# Altium PCB LPC55S69_MINI [C].PCBdoc (part 1 of 3)
Units mil, origin at the board's own origin, x right, y up, seen from the top; angles counter-clockwise.
Board outline 1610.03 x 1685.03 mil, 4 copper layers (Top Layer, PWR, GND, Bottom Layer), stack 39.556 mil thick; 73 components, 63 nets, 296 pads, 147 vias.
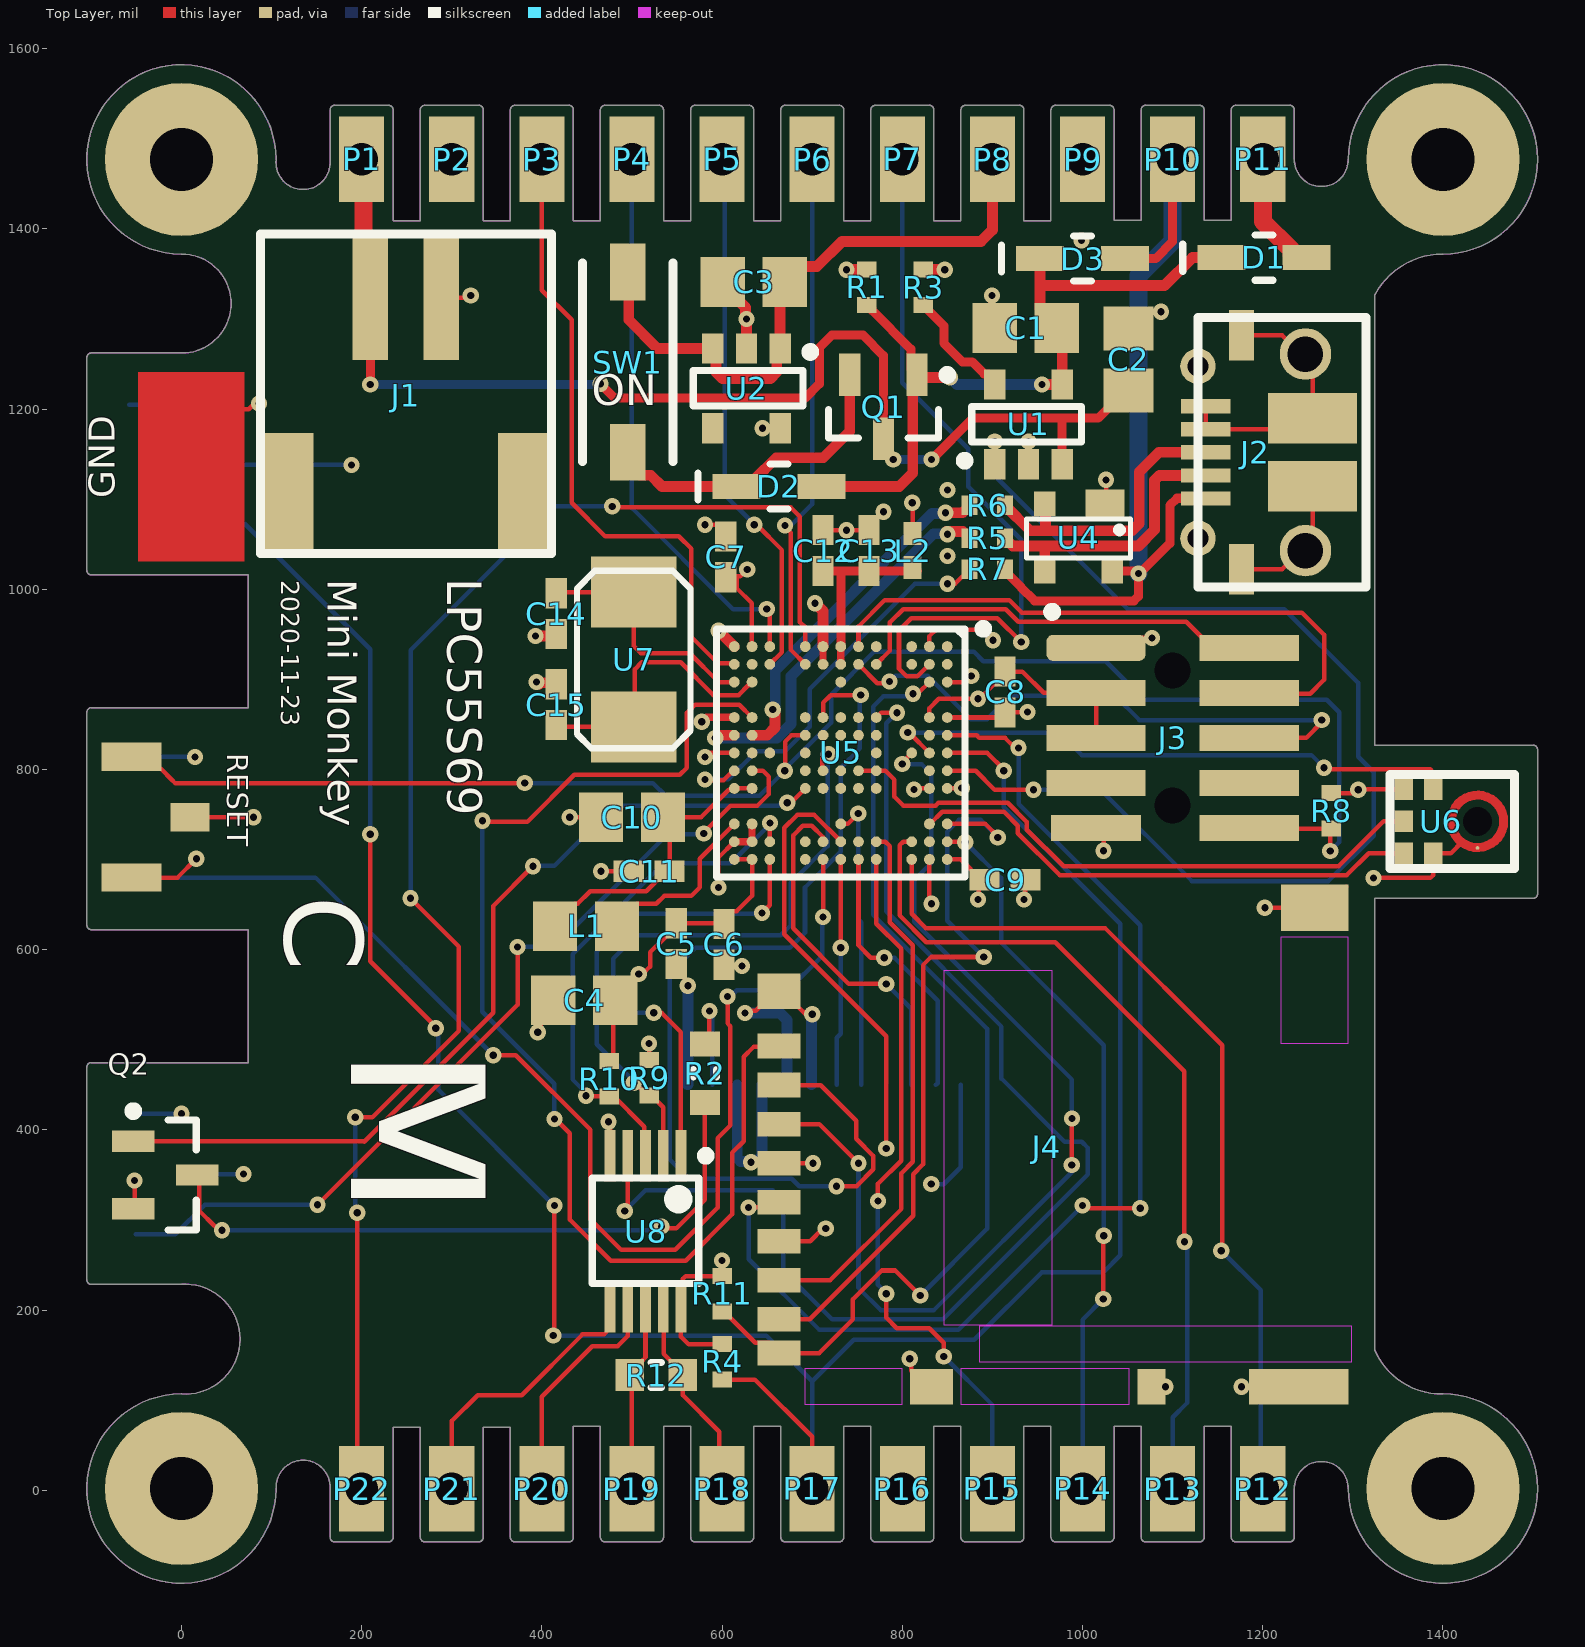
[diagram p0: Top Layer view]
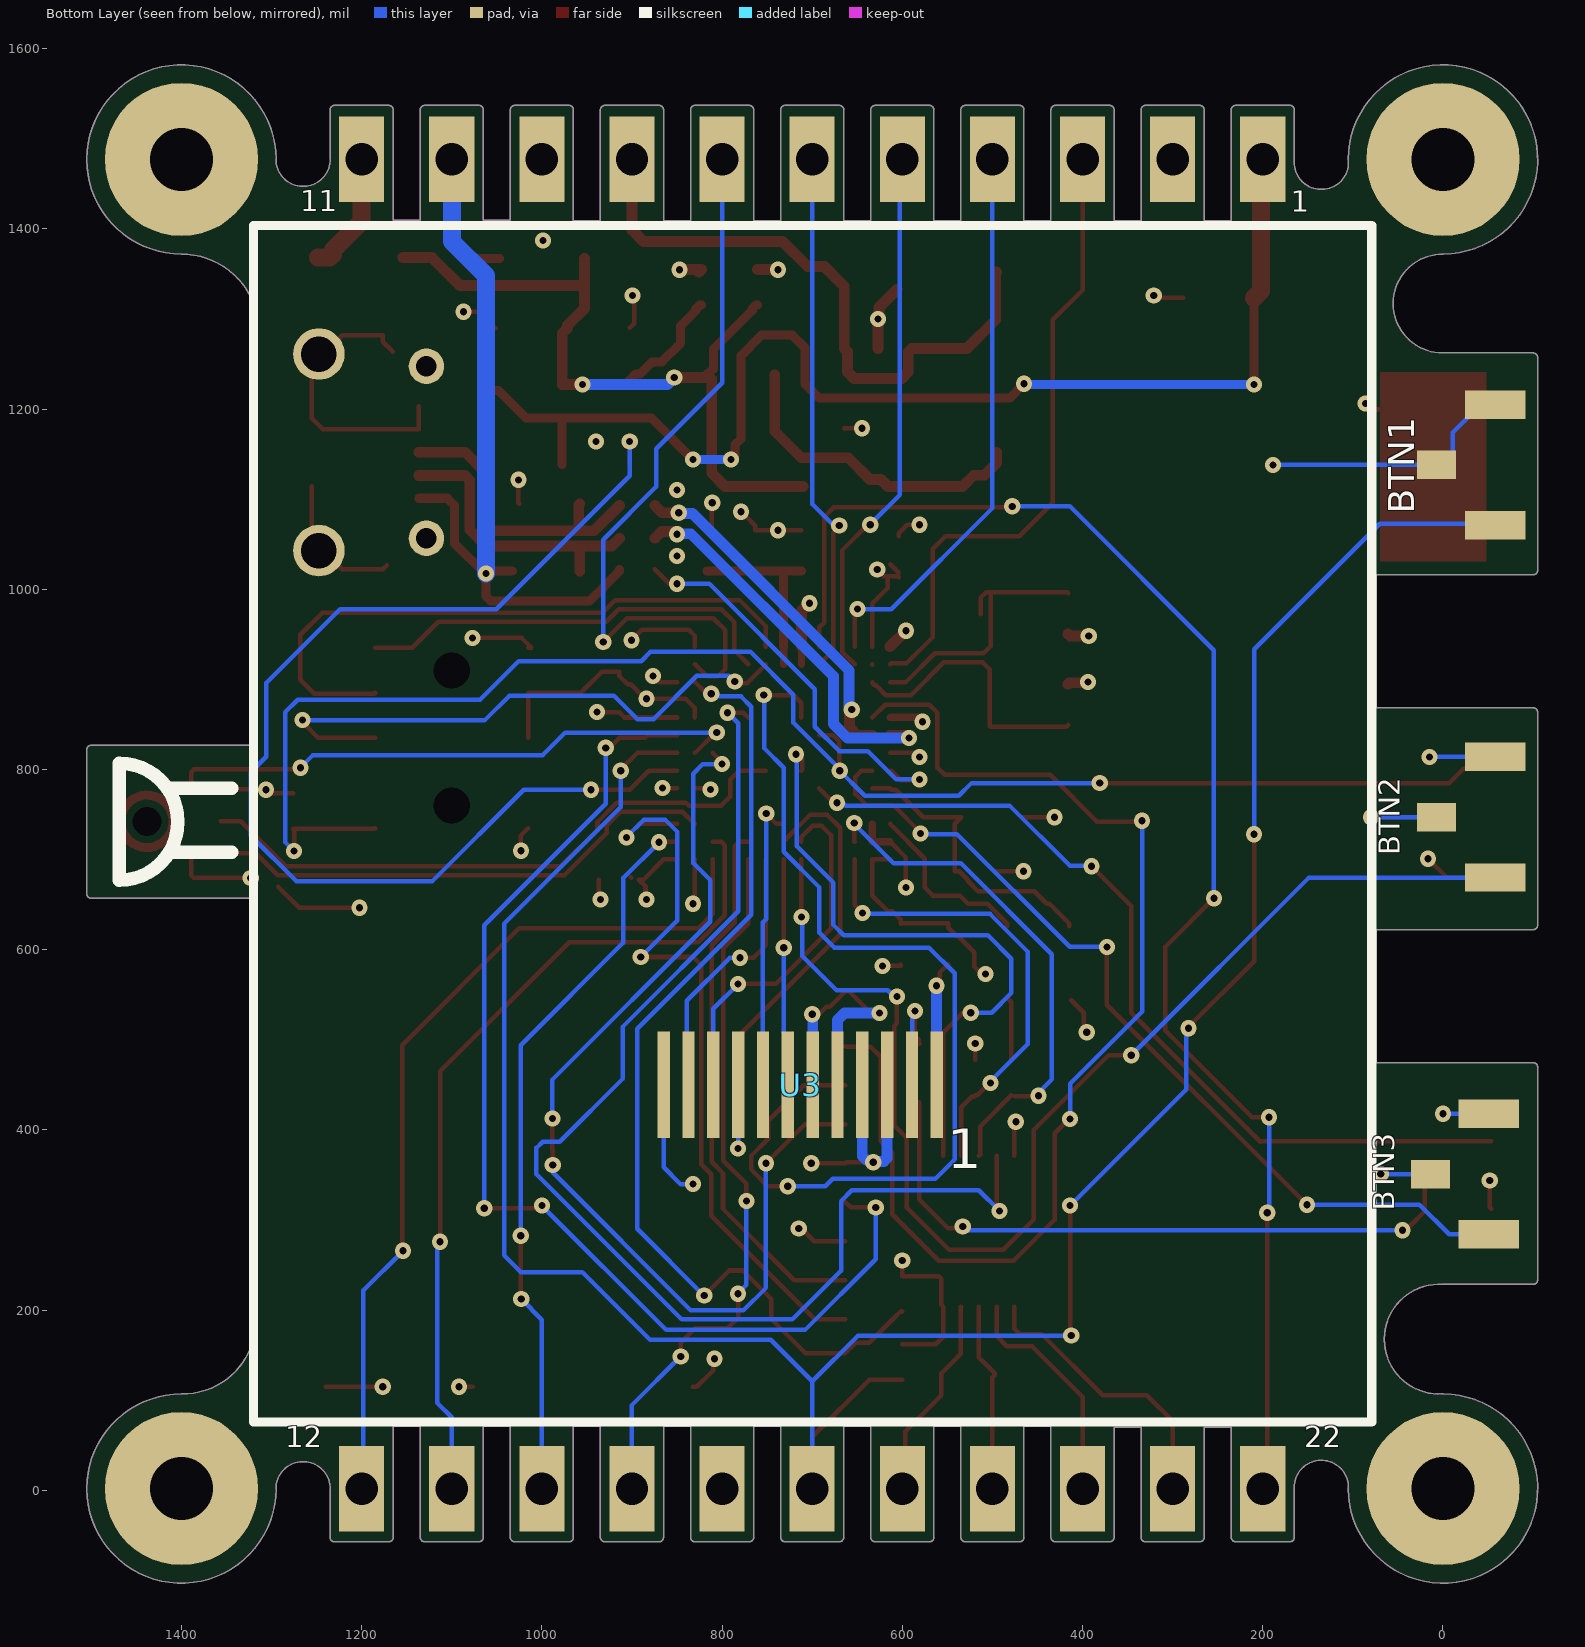
[diagram p1: Bottom Layer view, seen from below]
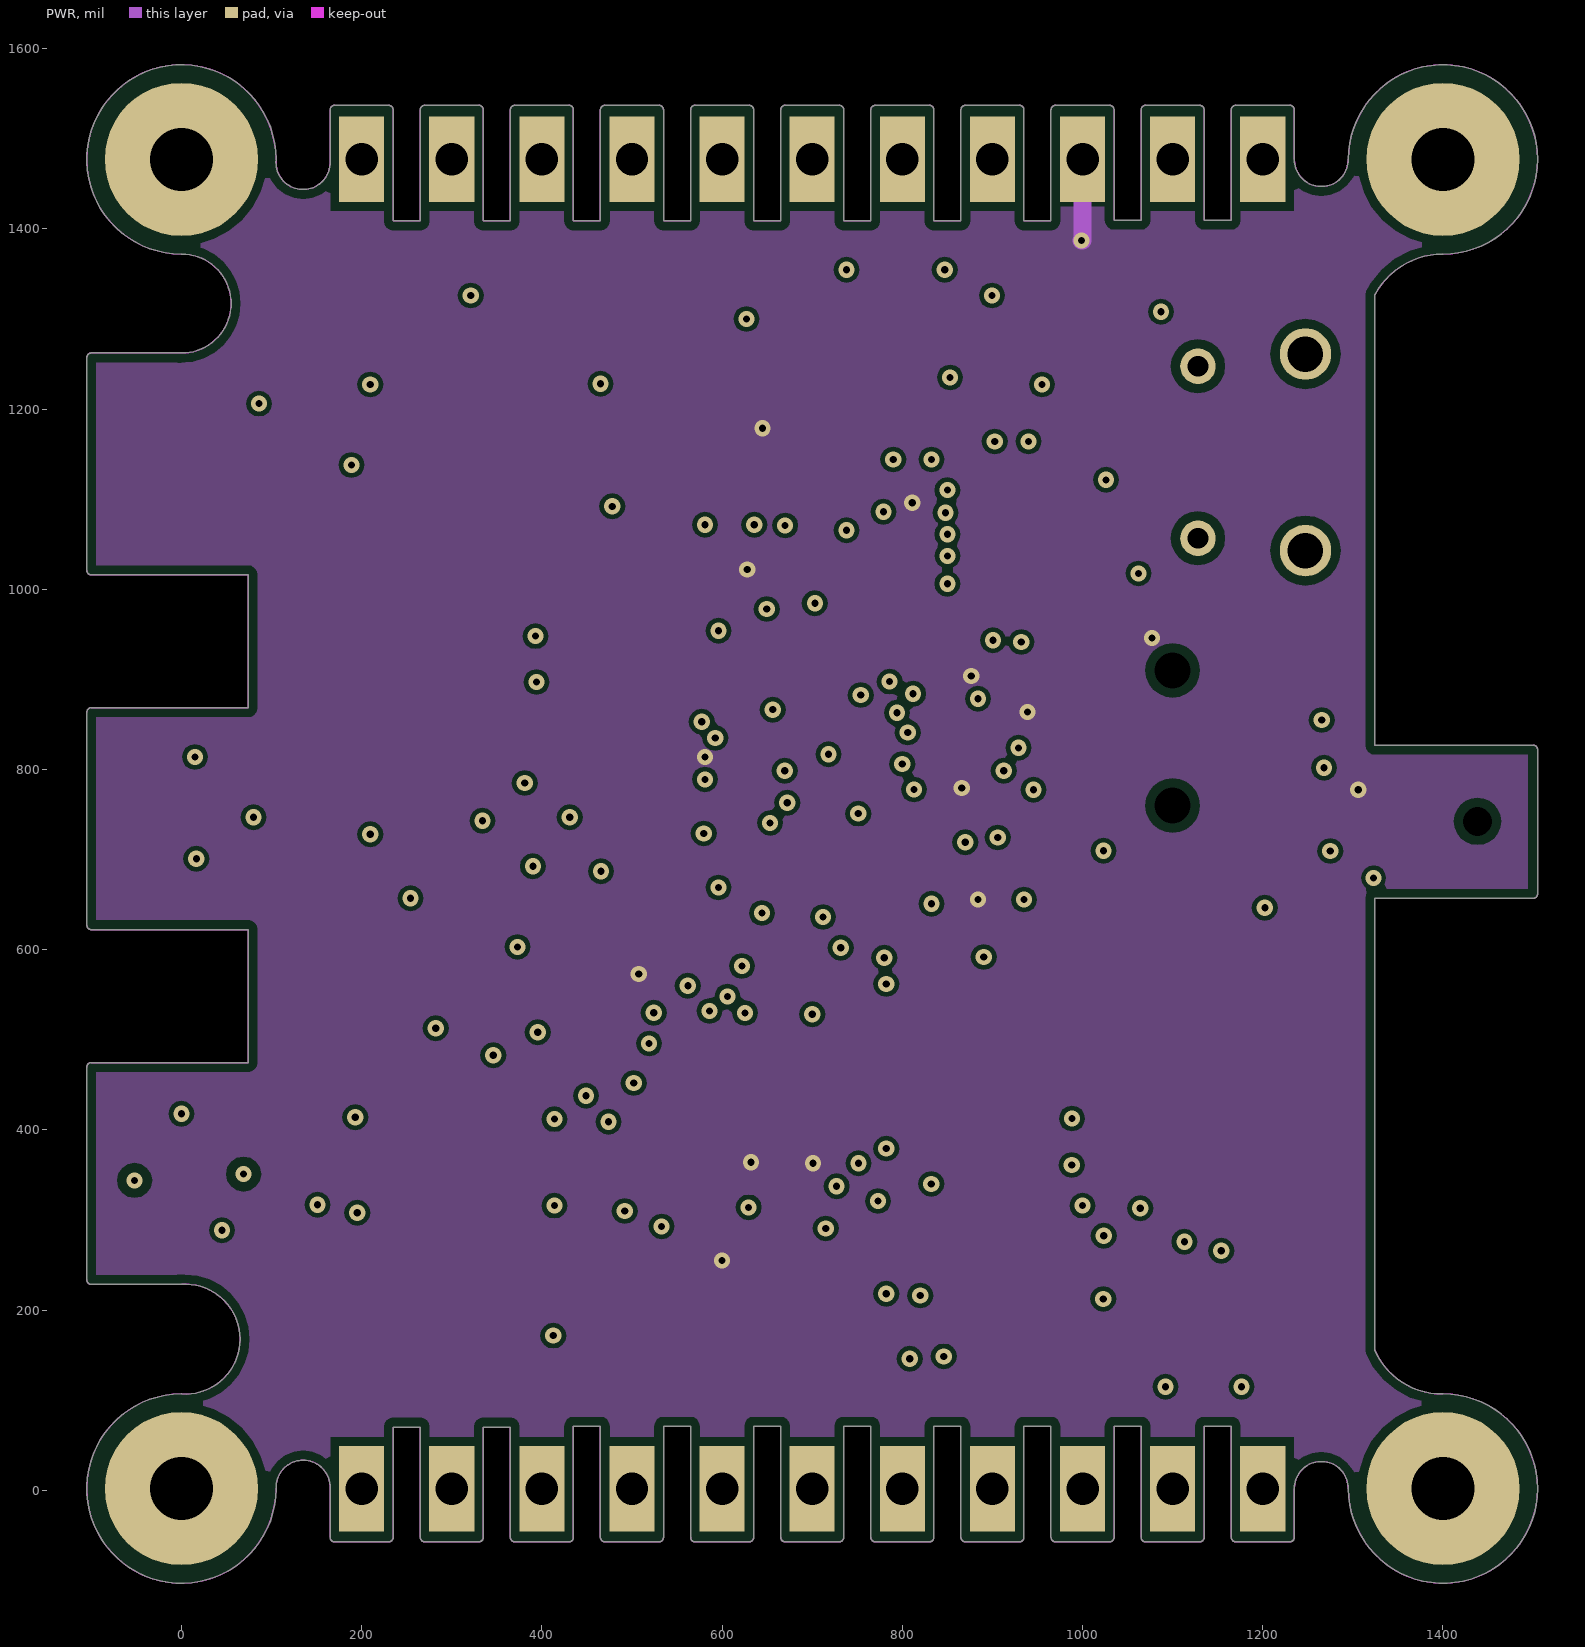
[diagram p2: PWR]
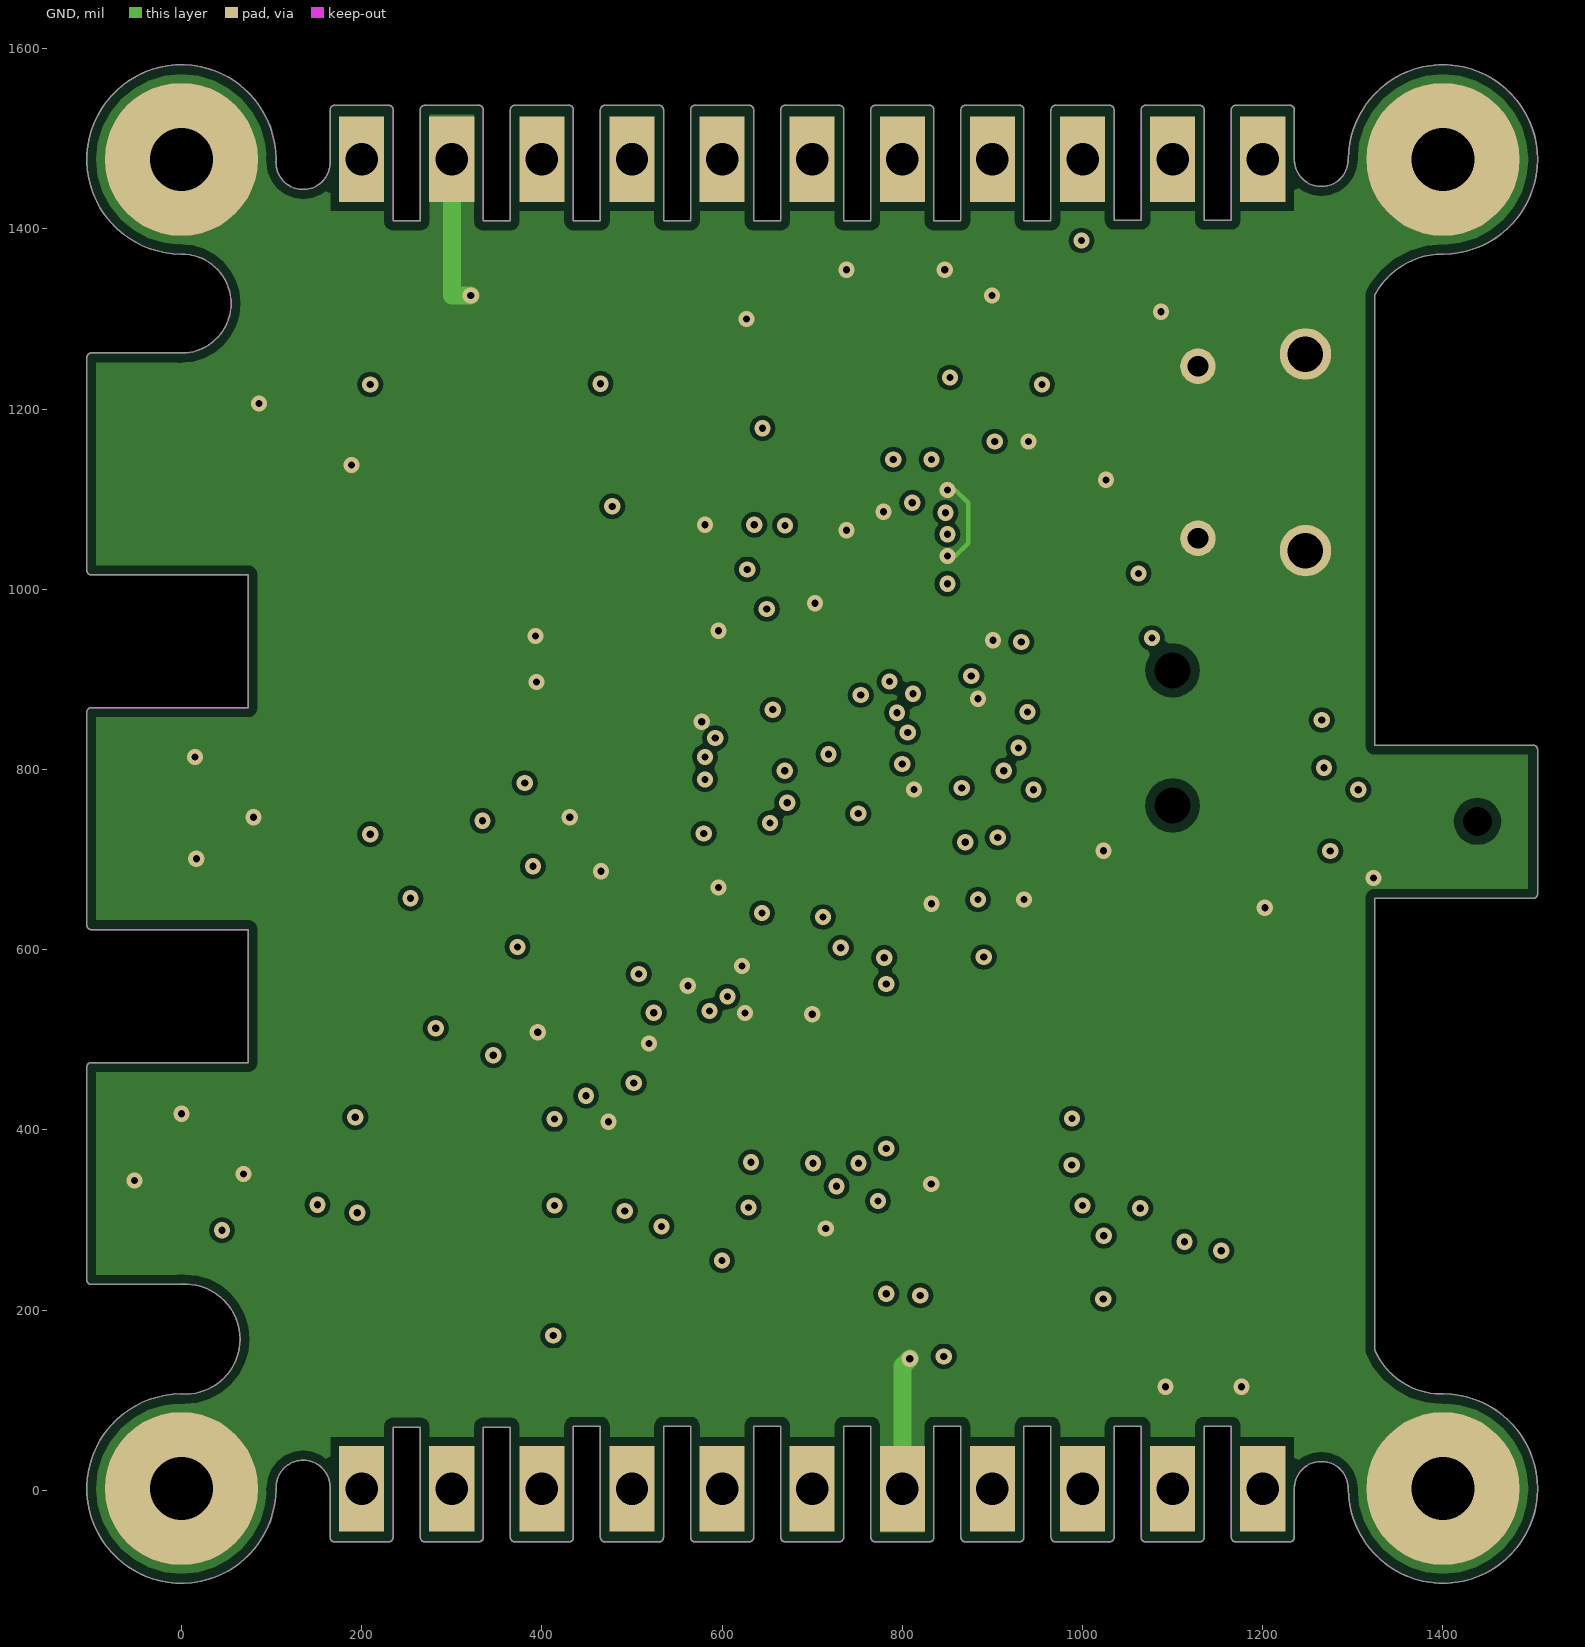
[diagram p3: GND]
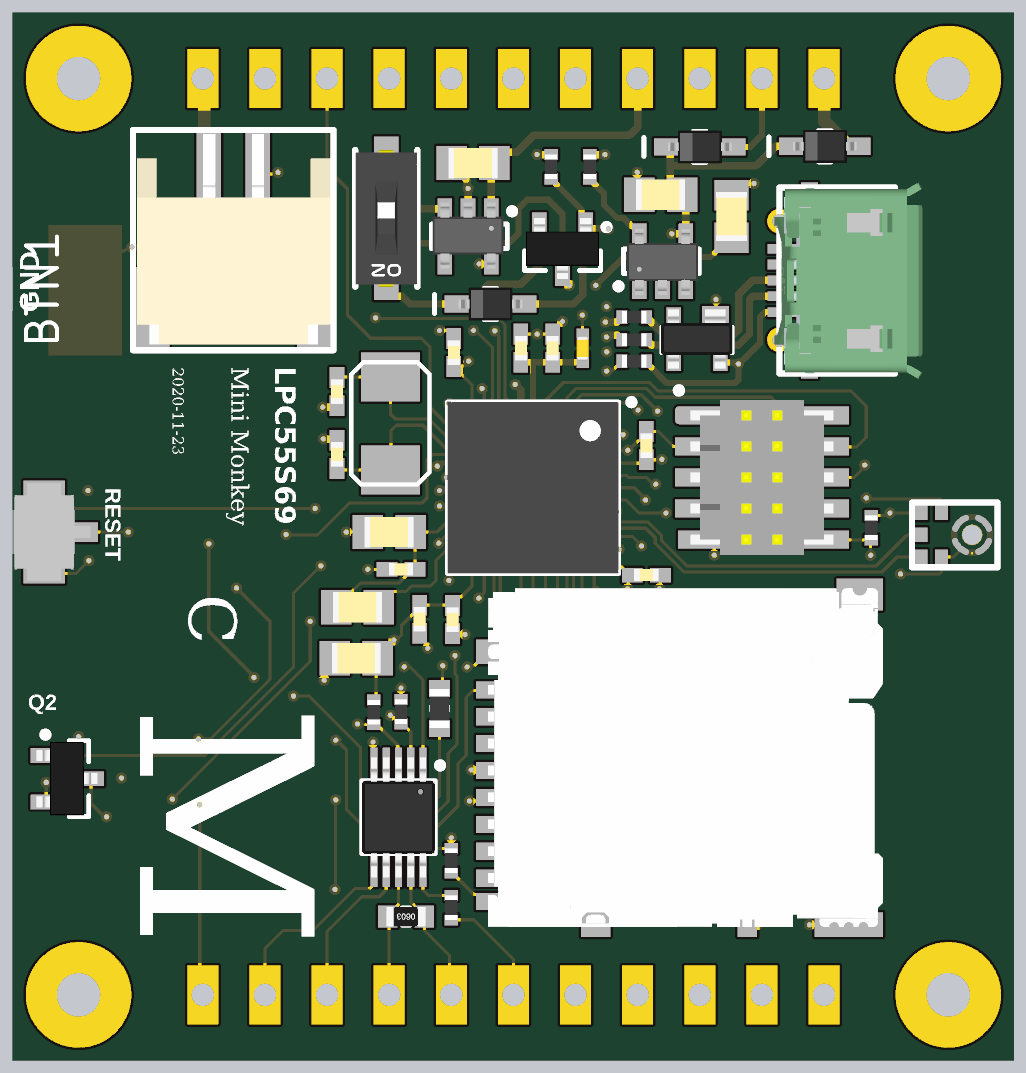
[diagram p5: 3D render of the assembled board from above, using the file's embedded part models]
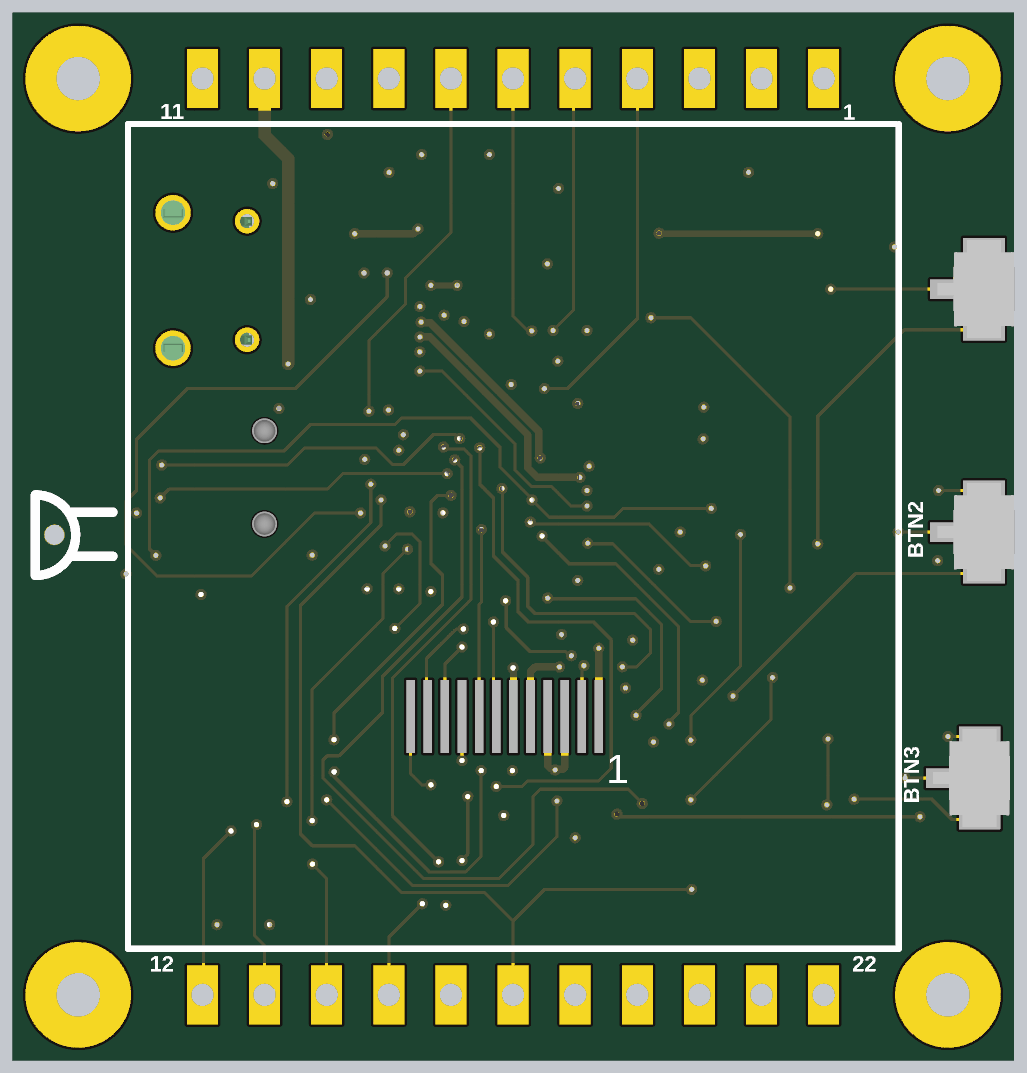
[diagram p6: 3D render of the assembled board from below, using the file's embedded part models]

## Layer stack, top to bottom
Top Solder: solder mask 0.4, Solder Resist, Dk 3.5
Top Layer: signal copper 1.4
Dielectric 1: prepreg 2.8, PP-006, Dk 4.1
PWR: signal copper 1.378
Dielectric1: dielectric 28.4, FR-4, Dk 4.8
GND: signal copper 1.378
Dielectric 2: prepreg 2.8, PP-006, Dk 4.1
Bottom Layer: signal copper 1.4
Bottom Solder: solder mask 0.4, Solder Resist, Dk 3.5

## Board outline
105.02,2 ccw(c100,2) 105.01,2.2 cw(c135,3.43) 165.01,3.43 cw(c135,3.43) 164.99,2.2 ccw(c170,2) 164.99,2 164.99,-52.09 ccw(c170,-52.09) 170,-57.11 230,-57.11 ccw(c230,-52.09) 235.02,-52.09 235.02,70.29 264.99,70.29 264.99,-52.09 ccw(c270,-52.09) 270,-57.11 330,-57.11 ccw(c330,-52.09) 335.02,-52.09 335.02,70.29 364.99,70.29 364.99,-52.09 ccw(c370,-52.09) 370,-57.11 430,-57.11 ccw(c430,-52.09) 435.02,-52.09 435.02,71.16 464.99,71.16 464.99,-52.09 ccw(c470,-52.09) 470,-57.11 530,-57.11 ccw(c530,-52.09) 535.02,-52.09 535.02,71.16 564.99,71.16 564.99,-52.09 ccw(c570,-52.09) 570,-57.11 630,-57.11 ccw(c630,-52.09) 635.02,-52.09 635.02,71.16 664.99,71.16 664.99,-52.09 ccw(c670,-52.09) 670,-57.11 730,-57.11 ccw(c730,-52.09) 735.02,-52.09 735.02,71.16 764.99,71.16 764.99,-52.09 ccw(c770,-52.09) 770,-57.11 830,-57.11 ccw(c830,-52.09) 835.02,-52.09 835.02,71.16 864.99,71.16 864.99,-52.09 ccw(c870,-52.09) 870,-57.11 930,-57.11 ccw(c930,-52.09) 935.02,-52.09 935.02,71.16 964.99,71.16 964.99,-52.09 ccw(c970,-52.09) 970,-57.11 1030,-57.11 ccw(c1030,-52.09) 1035.02,-52.09 1035.02,71.16 1064.99,71.16 1064.99,-52.09 ccw(c1070,-52.09) 1070,-57.11 1130,-57.11 ccw(c1130,-52.09) 1135.02,-52.09 1135.02,71.16 1164.99,71.16 1164.99,-52.09 ccw(c1170,-52.09) 1170,-57.11 1230,-57.11 ccw(c1230,-52.09) 1235.02,-52.09 1235.02,2 cw(c1265,2) 1294.99,2 ccw(c1400,2) 1505.02,2 ccw(c1400,2) 1400,107.01 ccw(c1400,102) 1399.88,107.01 ccw(c1398.53,187.93) 1399.91,107.01 1399.88,107.01 cw(c1398.53,187.93) 1324.23,155.85 1324.23,656.99 1500,656.99 ccw(c1500,662) 1505.02,662 1505.02,822 ccw(c1500,822) 1500,827.01 1324.23,827.01 1324.23,1326.81 cw(c1400.19,1285.54) 1399.98,1371.98 cw(c1400.19,1285.54) 1400.01,1371.99 1400,1371.99 ccw(c1400,1477) 1505.02,1477 ccw(c1400,1477) 1294.99,1477 cw(c1265,1477) 1235.02,1477 1235.02,1532 ccw(c1230,1532) 1230,1537.01 1170,1537.01 ccw(c1170,1532) 1164.99,1532 1164.99,1409.61 1135.02,1409.61 1135.02,1532 ccw(c1130,1532) 1130,1537.01 1070,1537.01 ccw(c1070,1532) 1064.99,1532 1064.99,1409.61 1035.02,1409.61 1035.02,1532 ccw(c1030,1532) 1030,1537.01 970,1537.01 ccw(c970,1532) 964.99,1532 964.99,1408.75 935.02,1408.75 935.02,1532 ccw(c930,1532) 930,1537.01 870,1537.01 ccw(c870,1532) 864.99,1532 864.99,1408.75 835.02,1408.75 835.02,1532 ccw(c830,1532) 830,1537.01 770,1537.01 ccw(c770,1532) 764.99,1532 764.99,1408.75 735.02,1408.75 735.02,1532 ccw(c730,1532) 730,1537.01 670,1537.01 ccw(c670,1532) 664.99,1532 664.99,1408.75 635.02,1408.75 635.02,1532 ccw(c630,1532) 630,1537.01 570,1537.01 ccw(c570,1532) 564.99,1532 564.99,1408.75 535.02,1408.75 535.02,1532 ccw(c530,1532) 530,1537.01 470,1537.01 ccw(c470,1532) 464.99,1532 464.99,1408.75 435.02,1408.75 435.02,1532 ccw(c430,1532) 430,1537.01 370,1537.01 ccw(c370,1532) 364.99,1532 364.99,1408.75 335.02,1408.75 335.02,1532 ccw(c330,1532) 330,1537.01 270,1537.01 ccw(c270,1532) 264.99,1532 264.99,1408.75 235.02,1408.75 235.02,1532 ccw(c230,1532) 230,1537.01 170,1537.01 ccw(c170,1532) 164.99,1532 164.99,1477 ccw(c170,1477) 165.01,1476.51 cw(c135,1473.79) 165.13,1473.79 cw(c135,1473.79) 104.99,1476.51 cw(c135,1473.79) 104.99,1476.54 104.99,1476.51 ccw(c100,1477) 105.02,1477 ccw(c0,1477) 0,1371.99 ccw(c0,1377) 0.03,1371.99 cw(c0.31,1317.1) 55.2,1317.1 cw(c0.31,1317.1) 0.03,1262.21 ccw(c0,1257.2) 0,1262.21 -100,1262.21 ccw(c-100,1257.2) -105.01,1257.2 -105.01,1020.98 ccw(c-100,1020.98) -100,1015.96 74.04,1015.96 74.04,868.51 -100,868.51 ccw(c-100,863.5) -105.01,863.5 -105.01,627.28 ccw(c-100,627.28) -100,622.26 74.04,622.26 74.04,474.81 -100,474.81 ccw(c-100,469.8) -105.01,469.8 -105.01,233.57 ccw(c-100,233.57) -100,228.56 0,228.56 ccw(c0,233.57) 0.32,228.57 cw(c4.21,167.79) 65.12,167.79 cw(c4.21,167.79) 0.35,107 cw(c4.21,167.79) 0.32,107 0.35,107 ccw(c0,102) 0,107.01 ccw(c0,2)

## Design rules (kind name [scope] priority, off if disabled: settings)
Clearance [All] p1: gap=5 ignorepadtopadclearanceinfootprint=FALSE except(10: Arc-Poly Track-Poly SMDPad-Poly THPad-Poly Via-Poly Fill-Poly Poly-Poly)
PlaneClearance [All] p1: clearance=10
PolygonConnect PolygonConnect_2 [InNet('GND')] p1: thpad.connectstyle=Direct thpad.reliefconductorwidth=10 thpad.reliefentries=4 thpad.polygonreliefangle="90 Angle" thpad.airgapwidth=10 smdpad.connectstyle=Relief smdpad.reliefconductorwidth=10 smdpad.reliefentries=4 smdpad.polygonreliefangle="90 Angle" smdpad.airgapwidth=10 via.connectstyle=Direct via.reliefconductorwidth=10 via.reliefentries=4 via.polygonreliefangle="90 Angle" via.airgapwidth=10
PolygonConnect PolygonConnect_1 [IsVia] p2: connectstyle=Direct reliefconductorwidth=10 reliefentries=4 polygonreliefangle="90 Angle" airgapwidth=10
PolygonConnect [All] p3: connectstyle=Relief reliefconductorwidth=10 reliefentries=4 polygonreliefangle="90 Angle" airgapwidth=5
RoutingVias [All] p1: holewidth=12 width=26 viastyle="Through Hole" minholewidth=6 minwidth=6 maxholewidth=50 maxwidth=75
SilkToSolderMaskClearance SilkscreenOverComponentPads [IsPad] p1: minsilkscreentomaskgap=10 clearancetoexposedcopper=TRUE
SolderMaskExpansion [All] p1: expansion=4 istentingtop=FALSE
Width [All] p1: maxlimit=200 minlimit=5 preferedwidth=5
28 further rules are at their usual default settings.

## Components (designator, comment, footprint, x,y, rotation, side; value= is the part's Value field where it differs from the comment)
BTN1 "B3U-1100P" OMRON_B3U-1100P -58,1138 r270 bottom
BTN2 "B3U-1100P" OMRON_B3U-1100P -58,747 r270 bottom
BTN3 "B3U-1100P" OMRON_B3U-1100P -50.93,351 r270 bottom
C1 "10µF" C0805_1.45MM_MD 937,1290 r0 top
C2 "10µF" C0805_1.45MM_MD 1051,1255 r270 top
C3 "10µF" C0805_1.45MM_MD 635,1341 r0 top
C4 "10µF" C0805_1.45MM_MD 447,544 r0 top
C5 "0.1µF" C0402_0.55MM_MD 549,606.64 r90 top
C6 "47pF" C0402_0.55MM_MD 602,606 r90 top
C7 "0.1µF" C0402_0.55MM_MD 604,1036 r270 top
C8 "0.1µF" C0402_0.55MM_MD 914,886 r270 top
C9 "0.1µF" C0402_0.55MM_MD 914,677.69 r180 top
C10 "10µF" C0805_1.45MM_MD 500,747 r0 top
C11 "0.1µF" C0402_0.55MM_MD 519,687 r0 top
C12 "0.1µF" C0402_0.55MM_MD 712,1042.94 r90 top
C13 "0.1µF" C0402_0.55MM_MD 763.06,1042.94 r270 top
C14 "18pF" C0402_0.55MM_MD 416,973 r90 top
C15 "18pF" C0402_0.55MM_MD 416,872 r270 top
D1 "BAT760-7" D_SOD-323_P 1201.24,1368 r180 top
D2 "BAT760-7" D_SOD-323_P 663.11,1114.11 r180 top
D3 "BAT760-7" D_SOD-323_P 1000,1367 r180 top
J1 "S2B-PH-SM4-TB(LF)(SN)" S2B-PH-SM4-TB(LF)(SN) 249,1215 r180 top
J2 "USB Micro B" "10103594-0001LF - NO SLOTS" 1191.69,1152 r180 top
J3 "FTSH-105-01-F-DV" FTSH-105-01-F-DV-K-A 1100,834.97 r270 top
J4 "DM3AT-SF-PEJM5" DM3AT-SF-PEJM5 1295,367 r90 top locked
L1 "CBC2012T4R7M" C0805_1.45MM_MD 449,626 r0 top
L2 "BKP1005EM221-T" C0402_HD 811.43,1042.94 r270 top
P1 "" CASTELLATED 200,1477 r0 top
P2 "" CASTELLATED 300,1477 r180 top
P3 "" CASTELLATED 400,1477 r180 top
P4 "" CASTELLATED 500,1477 r180 top
P5 "" CASTELLATED 600,1477 r180 top
P6 "" CASTELLATED 700,1477 r180 top
P7 "" CASTELLATED 800,1477 r180 top
P8 "" CASTELLATED 900,1477 r180 top
P9 "" CASTELLATED 1000,1477 r180 top
P10 "" CASTELLATED 1100,1477 r180 top
P11 "" CASTELLATED 1200,1477 r180 top
P12 "" CASTELLATED 1200,2 r180 top
P13 "" CASTELLATED 1100,2 r0 top
P14 "" CASTELLATED 1000,2 r0 top
P15 "" CASTELLATED 900,2 r0 top
P16 "" CASTELLATED 800,2 r0 top
P17 "" CASTELLATED 700,2 r0 top
P18 "" CASTELLATED 600,2 r0 top
P19 "" CASTELLATED 500,2 r0 top
P20 "" CASTELLATED 400,2 r0 top
P21 "" CASTELLATED 300,2 r0 top
P22 "" CASTELLATED 200,2 r0 top
Q1 "NTR1P02T1G" SOT-23 779,1202.43 r270 top
Q2 "FDV305N" SOT-23 -18,350 r0 top
R1 "10k" R0402_0.40MM_MD 760.63,1335 r90 top
R2 "33" R0603_0.55MM_MD 581,463 r90 top
R3 "10k" R0402_0.40MM_MD 823,1335 r270 top
R4 "10k" R0402_0.40MM_MD 600,142.59 r90 top
R5 "33" R0402_0.40MM_MD 894.31,1056.53 r180 top
R6 "33" R0402_0.40MM_MD 894.31,1093 r180 top
R7 "10k" R0402_0.40MM_MD 894.31,1022.08 r0 top
R8 "10k" R0402_0.40MM_MD 1276,754 r90 top
R9 "1k" R0402_0.40MM_MD 519,458 r270 top
R10 "1k" R0402_0.40MM_MD 475,457 r270 top
R11 "10k" R0402_0.40MM_MD 600,218.18 r270 top
R12 "100" R0603_HD 527,128 r180 top
RESET "B3U-1100P" OMRON_B3U-1100P -55.43,747 r90 top
SW1 "CHS-01TA" CHS-01TA 495.32,1332 r0 top
U1 "MCP73832T-2ATI/OT" SOT23-5 940,1183 r90 top
U2 "MCP1802T-3302I/OT" SOT23-5 627,1223 r270 top
U3 "ER-TFT1.54-1" ER-TFT1.54-1 713.31,450.11 r180 bottom locked
U4 "PRTR5V0U2X,215" SOT143B 1025,1094.8 r180 top
U5 "LPC55S69JEV98K" 98-VFBGA 731.69,818.31 r270 top
U6 "SPH0645LM4H-B" SPH0645LM4H-B 1438.29,742.43 r90 top
U7 "16MHz" ABM3 502,922 r90 top
U8 "ISL3176EIUZ-T" "10 MSOP" 515,287.66 r270 top

## Footprints (in the part's own frame and the unit in brackets; to place one, negate y for a bottom-side part, rotate by r counter-clockwise, add the part's x,y. Pads: shape width x height; smd on the part's side, far side on the other; paste and mask are expansions set on the pad)
"10 MSOP" [mm] "(Reference LTC DWG # 05-08-1661 Rev E)"
  rect 1.45x0.3 smd: 1(-2.125,1) 2(-2.125,0.5) 3(-2.125,0) 4(-2.125,-0.5) 5(-2.125,-1) 6(2.125,-1) 7(2.125,-0.5) 8(2.125,0) 9(2.125,0.5) 10(2.125,1)
  silkscreen extent -2.25,-1.5 1.48,1.83, body extent -2.45,-1.5 2.45,1.5, height 1.15
98-VFBGA [mil] "BGA, 98-Leads, Body 7.00x7.00mmx0.97mm, Pitch 0.50mm"
  round 12 smd paste+0 mask+1: A1(-118.11,118.11) A2(-98.43,118.11) A3(-78.74,118.11) A5(-39.37,118.11) A6(-19.69,118.11) A7(0,118.11) A8(19.69,118.11) A9(39.37,118.11) A11(78.74,118.11) A12(98.43,118.11) A13(118.11,118.11) B1(-118.11,98.43) B2(-98.43,98.43) B3(-78.74,98.43) B5(-39.37,98.43) B6(-19.69,98.43) B7(0,98.43) B8(19.69,98.43) B9(39.37,98.43) B11(78.74,98.43) B12(98.43,98.43) B13(118.11,98.43) C1(-118.11,78.74) C2(-98.43,78.74) C7(0,78.74) C12(98.43,78.74) C13(118.11,78.74) E1(-118.11,39.37) E2(-98.43,39.37) E5(-39.37,39.37) E6(-19.69,39.37) E7(0,39.37) E8(19.69,39.37) E9(39.37,39.37) E12(98.43,39.37) E13(118.11,39.37) F1(-118.11,19.68) F2(-98.43,19.68) F5(-39.37,19.68) F6(-19.69,19.68) F8(19.69,19.68) F9(39.37,19.68) F12(98.43,19.68) F13(118.11,19.68) G1(-118.11,0) G2(-98.43,0) G3(-78.74,0) G5(-39.37,0) G6(-19.69,0) G8(19.69,0) G9(39.37,0) G11(78.74,0) G12(98.43,0) G13(118.11,0) H1(-118.11,-19.69) H2(-98.43,-19.69) H5(-39.37,-19.69) H6(-19.69,-19.69) H8(19.69,-19.69) H9(39.37,-19.69) H12(98.43,-19.69) H13(118.11,-19.69) J1(-118.11,-39.37) J2(-98.43,-39.37) J5(-39.37,-39.37) J6(-19.69,-39.37) J7(0,-39.37) J8(19.69,-39.37) J9(39.37,-39.37) J12(98.43,-39.37) J13(118.11,-39.37) L1(-118.11,-78.74) L2(-98.43,-78.74) L7(0,-78.74) L12(98.43,-78.74) L13(118.11,-78.74) M1(-118.11,-98.43) M2(-98.43,-98.43) M3(-78.74,-98.43) M5(-39.37,-98.43) M6(-19.69,-98.43) M7(0,-98.43) M8(19.69,-98.43) M9(39.37,-98.43) M11(78.74,-98.43) M12(98.43,-98.43) M13(118.11,-98.43) N1(-118.11,-118.11) N2(-98.43,-118.11) N3(-78.74,-118.11) N5(-39.37,-118.11) N6(-19.69,-118.11) N7(0,-118.11) N8(19.69,-118.11) N9(39.37,-118.11) N11(78.74,-118.11) N12(98.43,-118.11) N13(118.11,-118.11)
  silkscreen extent -143,-138 138,163, body extent -138,-138 138,138, height 38
"10103594-0001LF - NO SLOTS" [mm] "USB uB"
  rect 1.4x0.4 smd: 1(1.4,1.3) 2(1.4,0.65) 3(1.4,0) 4(1.4,-0.65) 5(1.4,-1.3)
  rect 2.5x1.425 smd: MOUNT(-1.615,0.962) MOUNT(-1.615,-0.962)
  round 1.45 hole 1: MOUNT(-1.415,2.77) MOUNT(-1.415,-2.77)
  rect 0.7x1.425 smd: MOUNT(0.385,3.3) MOUNT(0.385,-3.3)
  round 1 hole 0.58: MOUNT(1.615,2.425) MOUNT(1.615,-2.425)
  silkscreen extent -3.11,-3.8 1.62,3.8, body extent -4.23,-4.01 1.81,4.03, height 2.9
ABM3 [mm] "Abracon Crystal 5x3.2mm"
  rect 2x2.4 smd: 1(-1.9,0) 2(1.9,0)
  silkscreen extent -2.5,-1.6 2.5,1.6, body extent -2.5,-1.6 2.5,1.6, height 1.3
C0402_0.55MM_MD [mm] "Capacitor - 0402 - Medium Density"
  rect 0.85x0.6 smd: 1(-0.575,0) 2(0.575,0)
  body extent -0.5,-0.25 0.5,0.25, height 0.55
C0402_HD [mm] "Capacitor 0402 - High Density"
  rect 0.65x0.5 smd: 1(-0.475,0) 2(0.475,0)
  body extent -0.5,-0.25 0.5,0.25, height 0.55
C0805_1.45MM_MD [mm] "Capacitor - 0805 - Medium Density"
  rect 1.25x1.4 smd: 1(-0.875,0) 2(0.875,0)
  body extent -1,-0.62 1,0.63, height 1.45
CASTELLATED [mil]
  rect 50x95 hole 36: 1(0,0)
CHS-01TA [mm]
  rect 1x1.6 smd: 1(0,-4.572) 2(0,0.508)
  silkscreen extent -1.27,-4.83 1.27,0.76, body extent -1.25,-4.83 1.25,0.77, height 2.53
D_SOD-323_P [mm] "SOD-123 Diode - Polarized"
  rect 1.35x0.7 smd: 1(-1.2,0) 2(1.2,0)
  silkscreen extent -0.25,-0.64 2.29,0.64, body extent -1.3,-0.68 1.3,0.67, height 1.1
DM3AT-SF-PEJM5 [mm] "Hirose DM3AT-SF-PEJM5 uSD connector - Normal Mount"
  rect 0.7x1.2 smd: 1(3.2,16.05) 2(2.1,16.05) 3(1,16.05) 4(-0.1,16.05) 5(-1.2,16.05) 6(-2.3,16.05) 7(-3.4,16.05) 8(-4.5,16.05) CDB(-5.45,16.05)
  rect 1x0.8 smd: CDA(-6.4,5.55)
  rect 1x1.2 smd: M(-6.4,11.75) M(4.75,16.05)
  rect 1x2.8 smd: M(-6.4,1.4)
  rect 1.3x1.9 smd: M(7.1,0.95)
  Top Layer keep-out region: 3.275,0 6.275,0 6.275,1.9 3.275,1.9
  Top Layer keep-out region: -6.9,12.573 -5.9,12.573 -5.9,15.325 -6.9,15.325
  Top Layer keep-out region: -6.9,6.172 -5.9,6.172 -5.9,10.922 -6.9,10.922
  Top Layer keep-out region: -5.7,-0.1 -4.7,-0.1 -4.7,10.4 -5.7,10.4
  Top Layer keep-out region: -4.648,8.35 5.325,8.35 5.325,11.4 -4.648,11.4
  body extent -6.49,0 7.36,16.15, height 1.68
ER-TFT1.54-1 [mm]
  rect 0.35x3 smd: 1(3.85,0) 2(3.15,0) 3(2.45,0) 4(1.75,0) 5(1.05,0) 6(0.35,0) 7(-0.35,0) 8(-1.05,0) 9(-1.75,0) 10(-2.45,0) 11(-3.15,0) 12(-3.85,0)
  silkscreen extent -15.41,-9.5 16.11,24.22, body extent -15.54,-9.63 16.24,24.35, height 2.1
FTSH-105-01-F-DV-K-A [mil] "Samtec FTSH-105-01-F-DV-K-A SMT Connector"
  rrect50% 29x110 smd: 1(-100,-85)
  rect 29x110 smd: 2(-100,85) 3(-50,-85) 4(-50,85) 5(0,-85) 6(0,85) 7(50,-85) 8(50,85) 10(100,85)
  rect 29x100 smd: 9(100,-85)
  round 5 hole 40 unplated mask+20: A(-75,0) A(75,0)
  silkscreen extent -145,-139 -135,-129, body extent -125,-115 125,115, height 241
OMRON_B3U-1100P [mm] "Omron Ultra-small tactile switch B3U 3.0 x 2.5 x 1.2mm"
  rect 0.8x1.7 smd: 1(-1.7,0) 2(1.7,0)
  rect 0.8x1.1 smd: S(0,-1.65)
  body extent -2,-1.9 2,1.25, height 1.61
R0402_0.40MM_MD [mm] "Resistor 0402 Medium Density"
  rect 0.45x0.55 smd: 1(-0.5,0) 2(0.5,0)
  body extent -0.5,-0.25 0.5,0.25, height 0.4
R0603_0.55MM_MD [mm] "Resistor 0603 Medium Density"
  rect 0.7x0.85 smd: 1(-0.825,0) 2(0.825,0)
  silkscreen extent -0.1,-0.33 0.1,0.33, body extent -0.8,-0.4 0.8,0.4, height 0.55
R0603_HD [mm] "0603 Resistor - High Density"
  rect 0.8x0.9 smd: 1(-0.75,0) 2(0.75,0)
  silkscreen extent -0.15,-0.35 0.15,0.35, body extent -0.8,-0.4 0.8,0.4, height 0.46
S2B-PH-SM4-TB(LF)(SN) [mm] "CONN HEADER PH SIDE 2POS 2MM SMD"
  rect 1x3.5 smd: 1(-1,-2.75) 2(1,-2.75)
  rect 1.5x3.4 smd: M1(3.35,2.75) M2(-3.35,2.75)
  silkscreen extent -4.1,-4.55 4.1,4.45, body extent -3.97,-4.39 3.93,4.21, height 5.6
SOT23-5 [mm] "SOT23, 5-Leads, Body 3.1x2.6mm (max), Pitch 0.95mm, IPC High Density"
  rect 0.85x0.6 smd: 1(-1.125,0.95) 2(-1.125,0) 3(-1.125,-0.95) 4(1.125,-0.95) 5(1.125,0.95)
  silkscreen extent -1.15,-1.5 0.5,1.92, body extent -1.38,-1.45 1.32,1.45, height 1.15
SOT143B [mm] "SOT143B"
  rect 1.1x0.8 smd: 1(0,0)
  rect 0.6x0.7 smd: 2(1.702,0) 3(1.702,1.9) 4(-0.2,1.9)
  silkscreen extent -0.71,0.43 2.21,1.52, body extent -0.7,-0.27 2.22,2.15, height 1
SOT-23 [mm] "SOT-23"
  rect 1.2x0.6 smd: 1(-0.9,0.95) 2(-0.9,-0.95) 3(0.9,0)
  silkscreen extent -1.02,-1.55 0.87,1.93, body extent -1.27,-1.5 1.23,1.5, height 1.07
SPH0645LM4H-B [mm]
  rect 0.6x0.522 smd: 1(-0.9,2.074) 2(-0.9,1.252) 4(0.9,1.252) 5(0.9,2.074) 6(0,2.074)
  round 0.1 smd paste-100 mask+0: 3(-0.75,0)
  round 0 hole 0.813 paste-2539.97: PORT_HOLE(0,0)
  Top Layer lines w0.254: -0.083,0.734 cw(c0,0) 0,-0.738 cw(c0,0) -0.593,0.44 cw(c0,0) -0.083,0.734
  silkscreen extent -1.33,-1.04 1.33,2.46, body extent -1.33,-1.02 1.33,2.45, height 1

## Part data
BTN1 BTN2 BTN3 RESET: "SWITCH TACTILE SPST-NO 0.05A 12V", Contact Rating @ Voltage="0.05A @ 12VDC", Illumination Type, Color=-, Manufacturer="Omron Electronics Inc-EMC Div", Operating Force=153gf, Operating Temperature="-25°C ~ 70°C", Supplier Part Number 1=SW1021CT-ND, Actuator Height off PCB, from Pins=1.60mm, Actuator Material=-, Actuator Orientation="Top Actuated", Actuator Type=Standard, Category=Switches, CategorySort=700, Circuit=SPST-NO, ComponentLink1Description=http://www.components.omron.com/components/web/PDFLIB.nsf/0/2DD3893C7DD33E9E862572900079E9D6/$file/B3U_1110.pdf, ComponentLink1URL=http://www.components.omron.com/components/web/PDFLIB.nsf/0/2DD3893C7DD33E9E862572900079E9D6/$file/B3U_1110.pdf, Features="Grounding Pin", Illumination=Non-Illuminated, Illumination Voltage (Nominal)=-, Ingress Protection="Dust Proof", Manufacturer Part Number=B3U-1100P, Mechanical Life="200,000 Cycles", Mounting Type="Surface Mount", Outline="3.00mm x 2.50mm", Packaging="Cut Tape (CT)", Pricing 1="1=1.25, 10=1.201, 25=1.1332, 50=0.997, 100=0.9064, 250=0.86108, 500=0.83842, 1000=0.65714 (USD)", RoHS="RoHS Compliant", Stock 1=45170, Supplier 1=Digi-Key, Switch Function=Off-Mom, Switch Travel=0.15mm, Termination Style="SMD (SMT) Tab"
C1 C2 C3 C4 C10: library part CGA4J1X7R0J106K125AC, "CAP CER 10UF 6.3V X7R 0805", Manufacturer="TDK Corporation", Operating Temperature="-55°C ~ 125°C", Package=0805, Ratings=AEC-Q200, Supplier Part Number 1=445-6971-1-ND, Temperature Coefficient=X7R, Tolerance=±10%, Voltage - Rated=6.3V, Category=Capacitors, ComponentLink1Description="Datasheet (Internal)", ComponentLink1URL=datasheets\TDK\mlcc_automotive_general_en.pdf, ComponentLink2Description="Datasheet (External)", ComponentLink2URL=https://product.tdk.com/info/en/catalog/datasheets/mlcc_automotive_general_en.pdf, Features=-, Manufacturer Part Number=CGA4J1X7R0J106K125AC, Substitution Notes="10µF , 6.3V , ±10% , X7R , -55°C ~ 125°C , AEC-Q200 , 0805", Supplier 1=Digikey, Thickness (Max)=1.45MM
C5 C7 C8 C9 C11 C12 C13: library part CGA2B1X7R1C104K050BC, "CAP CER 0.1UF 16V X7R 0402", Manufacturer="TDK Corporation", Operating Temperature="-55°C ~ 125°C", Package=0402, Ratings=AEC-Q200, Supplier Part Number 1=445-5613-1-ND, Temperature Coefficient=X7R, Tolerance=±10%, Voltage - Rated=16V, Category=Capacitors, ComponentLink1Description="Datasheet (Internal)", ComponentLink1URL=datasheets\TDK\mlcc_automotive_general_en.pdf, ComponentLink2Description="Datasheet (External)", ComponentLink2URL=https://product.tdk.com/info/en/catalog/datasheets/mlcc_automotive_general_en.pdf, Features=-, Manufacturer Part Number=CGA2B1X7R1C104K050BC, Substitution Notes="0.1µF , 16V , ±10% , X7R , -55°C ~ 125°C , AEC-Q200 , 0402", Supplier 1=Digikey, Thickness (Max)=0.55MM
C6: library part CGA2B2C0G1H470J050BA, "CAP CER 47PF 50V C0G 0402", Manufacturer="TDK Corporation", Operating Temperature="-55°C ~ 125°C", Package=0402, Ratings=AEC-Q200, Supplier Part Number 1=445-5592-1-ND, Temperature Coefficient="C0G, NP0", Tolerance=±5%, Voltage - Rated=50V, Category=Capacitors, ComponentLink1Description="Datasheet (Internal)", ComponentLink1URL=datasheets\TDK\mlcc_automotive_general_en.pdf, ComponentLink2Description="Datasheet (External)", ComponentLink2URL=https://product.tdk.com/info/en/catalog/datasheets/mlcc_automotive_general_en.pdf, Features=-, Manufacturer Part Number=CGA2B2C0G1H470J050BA, Substitution Notes="47pF , 50V , ±5% , C0G, NP0 , -55°C ~ 125°C , AEC-Q200 , 0402", Supplier 1=Digikey, Thickness (Max)=0.55MM
C14 C15: library part CGA2B2C0G1H180J050BA, "CAP CER 18PF 50V C0G 0402", Manufacturer="TDK Corporation", Operating Temperature="-55°C ~ 125°C", Package=0402, Ratings=AEC-Q200, Supplier Part Number 1=445-5587-1-ND, Temperature Coefficient="C0G, NP0", Tolerance=±5%, Voltage - Rated=50V, Category=Capacitors, ComponentLink1Description="Datasheet (Internal)", ComponentLink1URL=datasheets\TDK\mlcc_automotive_general_en.pdf, ComponentLink2Description="Datasheet (External)", ComponentLink2URL=https://product.tdk.com/info/en/catalog/datasheets/mlcc_automotive_general_en.pdf, Features=-, Manufacturer Part Number=CGA2B2C0G1H180J050BA, Substitution Notes="18pF , 50V , ±5% , C0G, NP0 , -55°C ~ 125°C , AEC-Q200 , 0402", Supplier 1=Digikey, Thickness (Max)=0.55MM
D1 D2 D3: "DIODE SCHOTTKY 30V 1A SOD323", Capacitance @ Vr- F="25pF @ 5V- 1MHz", Current - Average Rectified (Io)=1A, Current - Reverse Leakage @ Vr="50µA @ 15V", Manufacturer="Diodes Inc", Package="SC-76- SOD-323", Supplier Device Package=SOD-323, Supplier Part Number 1=BAT760DICT-ND, Voltage - DC Reverse (Vr) (Max)=30V, Voltage - Forward (Vf) (Max) @ If="550mV @ 1A", Category=Diodes, CategorySort=400, ComponentLink1Description="Internal Datasheet", ComponentLink1URL=http://www.diodes.com/datasheets/ds30498.pdf, ComponentLink2Description="External Datasheet", ComponentLink2URL=http://www.diodes.com/datasheets/ds30498.pdf, Diode Suffix=1A_2C, Diode Type=Schottky, Manufacturer Part Number=BAT760-7, Mounting Type="Surface Mount", Num Pins=2, Packaging="Cut Tape (CT)", Reverse Recovery Time (trr)=-, SortValue=BAT760-7, Speed="Fast Recovery =< 500ns- > 200mA (Io)", Supplier 1=Digi-Key
J1: "CONN HEADER PH SIDE 2POS 2MM SMD", Color=Natural, Manufacturer="JST Sales America Inc", Supplier Part Number 1=455-1749-1-ND, Category="Connectors, Interconnects", ComponentLink1Description=http://www.jst-mfg.com/product/pdf/eng/ePH.pdf, ComponentLink1URL=http://www.jst-mfg.com/product/pdf/eng/ePH.pdf, Connector Type="Header, Shrouded", Contact Finish=Tin, Contact Finish Thickness=-, Contact Mating Length=-, Contact Type="Male Pin", Fastening Type=-, Features="Solder Retention", Manufacturer Part Number=S2B-PH-SM4-TB(LF)(SN), Mounting Type="Surface Mount, Right Angle", Number of Positions=2, Number of Positions Loaded=All, Number of Rows=1, Packaging="Cut Tape (CT)", Pitch="0.079\" (2.00mm)", Pricing 1="1=0.5, 10=0.457, 100=0.3809, 500=0.3047 (USD)", RoHS="RoHS Compliant", Row Spacing=-, Stock 1=17700, Supplier 1=Digi-Key, Termination=Solder
J2: library part 10103594-0001LF, "CONN RCPT STD MICRO USB TYPE B", Manufacturer=FCI, Supplier Part Number 1=609-4050-1-ND, Category="Connectors, Interconnects", ComponentLink1Description=http://portal.fciconnect.com/res/en/pdffiles/doc_search/10103594.pdf, ComponentLink1URL=http://portal.fciconnect.com/res/en/pdffiles/doc_search/10103594.pdf, Connector Type="USB - micro B", Features="Shielded, Solder Retention", Gender=Receptacle, Ingress Protection=-, Manufacturer Part Number=10103594-0001LF, Micro USB B=Value, Mounting Type="Surface Mount, Right Angle, Horizontal", Notes="Similar to", Number of Contacts=5, Packaging="Cut Tape (CT)", Pricing 1="1=1.1, 10=0.768, 100=0.517, 250=0.43912, 500=0.41716 (USD)", RoHS="RoHS Compliant", Specifications="USB 2.0", Stock 1=23288, Supplier 1=Digi-Key
J3: library part CORTEX-DEBUG, "SAMTEC - FTSH-105-01-F-DV - .050 X .050", Manufacturer=SAMTEC, Supplier Part Number 1=01R3399, Category=Connectors, Manufacturer Part Number=FTSH-105-01-F-DV, Pricing 1="1=0.974, 25000=0.835, 50000=0.774 (USD)", Stock 1=0, Supplier 1=Newark
J4: "CONN MICRO SD R/A PUSH-PUSH SMD", Manufacturer="Hirose Electric Co Ltd", Supplier Part Number 1=HR1964CT-ND, Card Type="Secure Digital - microSD™", Category="Connectors, Interconnects", ComponentLink1Description=http://www.hirose.co.jp/cataloge_hp/e60900232.pdf, ComponentLink1URL=http://www.hirose.co.jp/cataloge_hp/e60900232.pdf, Connector Type="Connector and Ejector", Contact Finish=Gold, Contact Finish Thickness=-, Ejector Side=-, Features=Switch, Height Above Board="0.066\" (1.68mm)", Insertion, Removal Method="Push In, Push Out", Manufacturer Part Number=DM3AT-SF-PEJM5, Mounting Feature="Normal, Standard - Top", Mounting Type="Surface Mount, Right Angle", Number of Positions="10 (8 + 2)", Packaging="Cut Tape (CT)", Pricing="1=2.83, 10=2.72, 25=2.4932, 50=2.3798, 100=2.2664, 250=1.98312, 500=1.92648 (USD)", RoHS="RoHS Compliant", Stock=28699, Supplier 1=Digi-Key
L1: "FIXED IND 4.7UH 520MA 650 MOHM", Case/Package=0805, Case Code (Metric)=2012, Current Rating=520mA, DC Resistance (DCR)=650mR, Inductance=4.7uH, Inductance Tolerance=20%, Manufacturer="Taiyo Yuden", Max Operating Temperature=105°C, Min Operating Temperature=-40°C, Package Quantity=3000, Saturation Current=360mA, Self Resonant Frequency=45MHz, Supplier Part Number 1=587-1602-1-ND, Test Frequency=7.96MHz, Case Code (Imperial)=0805, ComponentLink1Description=https://datasheet.ciiva.com/15981/214cbc2012t4r7m-15981637.pdf?src-supplier=Onlinecomponents.com, ComponentLink1URL=https://datasheet.ciiva.com/15981/214cbc2012t4r7m-15981637.pdf?src-supplier=Onlinecomponents.com, ComponentLink2Description=https://datasheet.ciiva.com/1040/cbc2012t4r7m-ss-1040456.pdf?src-supplier=Digi-Key, ComponentLink2URL=https://datasheet.ciiva.com/1040/cbc2012t4r7m-ss-1040456.pdf?src-supplier=Digi-Key, ComponentLink3Description=https://datasheet.ciiva.com/8505/cbc2012t4r7m-ss-8505656.pdf?src-supplier=Avnet, ComponentLink3URL=https://datasheet.ciiva.com/8505/cbc2012t4r7m-ss-8505656.pdf?src-supplier=Avnet, ComponentLink4Description=https://datasheet.ciiva.com/8001/wound02-e-8001849.pdf?src-supplier=Element14, ComponentLink4URL=https://datasheet.ciiva.com/8001/wound02-e-8001849.pdf?src-supplier=Element14, Composition=Wirewound, Core Material=Ferrite, Halogen Free="Halogen Free", Height=1.25mm, Height - Seated (Max)=0.057inch, Lead Free=Exempt, Length=0.079inch, Manufacturer Part Number=CBC2012T4R7M, Max DC Current=520mA, Mount="Surface Mount", Number of Pins=2, Packaging="Tape and Reel", Pricing 1="1=0.24000, 10=0.21600, 100=0.14860, 500=0.12702, 1000=0.09729 (USD)", REACH SVHC="No SVHC", RoHS=Yes, Shielding=Unshielded, Stock 1=7720, Supplier 1=Digi-Key, Termination=SMD/SMT, Tolerance=20%, Width=0.049inch
L2: "FERRITE BEAD 220 OHM 0402 1LN", Current Rating (Max)=1A, DC Resistance (DCR) (Max)="150 mOhm", Impedance @ Frequency="220 Ohm @ 100MHz", Manufacturer="Taiyo Yuden", Operating Temperature="-55°C ~ 85°C", Package / Case="0402 (1005 Metric)", Ratings=-, Supplier Part Number 1=587-3290-2-ND, Category=Filters, ComponentLink1Description=http://ds.yuden.co.jp/TYCOMPAS/ut/detail.do?productNo=BKP1005EM221-T&fileName=BKP1005EM221-T_SS&mode=specSheetDownload, ComponentLink1URL=http://ds.yuden.co.jp/TYCOMPAS/ut/detail.do?productNo=BKP1005EM221-T&fileName=BKP1005EM221-T_SS&mode=specSheetDownload, Filter Type="Power Line", Height (Max)="0.022\" (0.55mm)", Manufacturer Part Number=BKP1005EM221-T, Mounting Type="Surface Mount", Number of Lines=1, Packaging="Tape & Reel (TR)", Pricing 1="10000=0.0145, 20000=0.014, 30000=0.013, 50000=0.01285 (USD)", RoHS="RoHS Compliant", Size / Dimension="0.039\" L x 0.022\" W (1.00mm x 0.55mm)", Stock 1=60000, Supplier 1=Digi-Key
P1 P2 P3 P4 P5 P6 P7 P8 P9 P10 P11 P12 P13 P14 P15 P16 P17 P18 P19 P20 P21 P22: library part CASTELLATED
Q1: "MOSFET P-CH 20V 1A SOT-23", Case/Package=SOT-23-3, Continuous Drain Current (ID)=1A, Current Rating=-1A, Drain to Source Breakdown Voltage=-20V, Drain to Source Resistance=148mR, Drain to Source Voltage (Vdss)=20V, Input Capacitance=165pF, Manufacturer="ON Semiconductor", Max Operating Temperature=150°C, Max Power Dissipation=400mW, Min Operating Temperature=-55°C, On-State Resistance=148MR, Package Quantity=1, Supplier Part Number 1=NTR1P02T1GOSCT-ND, Threshold Voltage=-1.9V, Category=MOSFETs, ComponentLink1Description=https://datasheet.ciiva.com/22641/1708311-22641684.pdf?src-supplier=Element14, ComponentLink1URL=https://datasheet.ciiva.com/22641/1708311-22641684.pdf?src-supplier=Element14, ComponentLink2Description=https://datasheet.ciiva.com/936/ntr1p02t1-d-936864.pdf?src-supplier=Digi-Key, ComponentLink2URL=https://datasheet.ciiva.com/936/ntr1p02t1-d-936864.pdf?src-supplier=Digi-Key, ComponentLink3Description=https://datasheet.ciiva.com/22641/1708311-22641686.pdf?src-supplier=Element14, ComponentLink3URL=https://datasheet.ciiva.com/22641/1708311-22641686.pdf?src-supplier=Element14, ComponentLink4Description=https://datasheet.ciiva.com/26145/ntr1p02t1-d-26145674.pdf?src-supplier=Avnet+Europe, ComponentLink4URL=https://datasheet.ciiva.com/26145/ntr1p02t1-d-26145674.pdf?src-supplier=Avnet+Europe, ComponentLink5Description=https://datasheet.ciiva.com/11168/ntr1p02t1-d-11168174.pdf?src-supplier=Avnet, ComponentLink5URL=https://datasheet.ciiva.com/11168/ntr1p02t1-d-11168174.pdf?src-supplier=Avnet, ComponentLink6Description=https://datasheet.ciiva.com/16386/ntr1p02t1-d-16386335.pdf?src-supplier=Future+Electronics, ComponentLink6URL=https://datasheet.ciiva.com/16386/ntr1p02t1-d-16386335.pdf?src-supplier=Future+Electronics, ComponentLink7Description=https://datasheet.ciiva.com/936/ntr1p02t1-d-936865.pdf?src-supplier=Digi-Key, ComponentLink7URL=https://datasheet.ciiva.com/936/ntr1p02t1-d-936865.pdf?src-supplier=Digi-Key, Contact Plating=Tin,Matte, Element Configuration=Single, Fall Time=9ns, Gate to Source Voltage (Vgs)=20V, Height=0.94mm, Lead Free="Lead Free", Length=2.9mm, Manufacturer Part Number=NTR1P02T1G, Nominal Vgs=-1.9V, Number of Elements=1, Number of Pins=3, Packaging="Tape and Reel", Power Dissipation=400mW, Pricing="1=0.48000, 10=0.35500, 25=0.31080, 100=0.16870, 500=0.13764, 1000=0.10212 (USD)", Radiation Hardening=No, Rds On Max=180mR, REACH SVHC="No SVHC", Rise Time=9ns, RoHS=Yes, Stock=320, Supplier 1=Digi-Key, Turn-Off Delay Time=9ns, Turn-On Delay Time=7ns, Voltage Rating (DC)=-20V, Width=1.3mm
Q2: library part FDV305, "MOSFET N-CH 20V 0.9A SOT-23", Manufacturer="Fairchild Semiconductor", Source Part Number=FDV305NCT-ND, Manufacturer Part Number=FDV305N, Source=Digikey
R1 R3 R4 R7 R8 R11: library part ERJ-2RKF1002X, "RES 10K OHM 1/10W 1% 0402 SMD", Limiting Element Voltage=50, Manufacturer="Panasonic Electronic Components", Maximum Overload Voltage=100, Maximum Working Voltage=31.6V, Package="0402 (1005 Metric)", Package Power="0402  (0.1W)", Power (Watts)="0.1W- 1/10W", Ratings=AEC-Q200, Sort Value=10000, Sort Value Package=402_10000, Supplier Package=0402, Supplier Part Number 1=P10.0KLCT-ND, Temperature Coefficient=±100ppm/°C, Tolerance=±1%, Category=Resistors, ComponentLink1Description="Internal Datasheet", ComponentLink1URL="datasheets\Panasonic Electronic Components\AOA0000CE2.pdf", ComponentLink2Description="External Datasheet", ComponentLink2URL=http://industrial.panasonic.com/www-data/pdf/AOA0000/AOA0000CE2.pdf, Composition="Thick Film", Features=-, Height=0.40MM, Manufacturer Part Number=ERJ-2RKF1002X, Number of Terminations=2, Packaging="Cut Tape (CT)", Resistance (Ohms)=10k, Size / Dimension="0.039\" L x 0.020\" W (1.00mm x 0.50mm)", Substitution Notes="10k , ±1% , 0402 , AEC-Q200", Supplier 1=Digi-Key
R2: library part ERJ-3EKF33R0V, "RES 33 OHM 1/10W 1% 0603 SMD", Limiting Element Voltage=75, Manufacturer="Panasonic Electronic Components", Maximum Overload Voltage=150, Maximum Working Voltage=1.8V, Package="0603 (1608 Metric)", Package Power="0603  (0.1W)", Power (Watts)="0.1W- 1/10W", Ratings=AEC-Q200, Sort Value Package=603_33, Supplier Package=0603, Supplier Part Number 1=P33.0HCT-ND, Temperature Coefficient=±100ppm/°C, Tolerance=±1%, Category=Resistors, ComponentLink1Description="Internal Datasheet", ComponentLink1URL="datasheets\Panasonic Electronic Components\AOA0000CE2.pdf", ComponentLink2Description="External Datasheet", ComponentLink2URL=http://industrial.panasonic.com/www-data/pdf/AOA0000/AOA0000CE2.pdf, Composition="Thick Film", Features=-, Height=0.55MM, Manufacturer Part Number=ERJ-3EKF33R0V, Number of Terminations=2, Packaging="Cut Tape (CT)", Resistance (Ohms)=33, Size / Dimension="0.063\" L x 0.031\" W (1.60mm x 0.80mm)", Sort Value=33, Substitution Notes="33 , ±1% , 0603 , AEC-Q200", Supplier 1=Digi-Key
R5 R6: library part ERJ-2RKF33R0X, "RES 33 OHM 1/10W 1% 0402 SMD", Limiting Element Voltage=50, Manufacturer="Panasonic Electronic Components", Maximum Overload Voltage=100, Maximum Working Voltage=1.8V, Package="0402 (1005 Metric)", Package Power="0402  (0.1W)", Power (Watts)="0.1W- 1/10W", Ratings=AEC-Q200, Sort Value Package=402_33, Supplier Package=0402, Supplier Part Number 1=P33.0LCT-ND, Temperature Coefficient=±100ppm/°C, Tolerance=±1%, Category=Resistors, ComponentLink1Description="Internal Datasheet", ComponentLink1URL="datasheets\Panasonic Electronic Components\AOA0000CE2.pdf", ComponentLink2Description="External Datasheet", ComponentLink2URL=http://industrial.panasonic.com/www-data/pdf/AOA0000/AOA0000CE2.pdf, Composition="Thick Film", Features=-, Height=0.40MM, Manufacturer Part Number=ERJ-2RKF33R0X, Number of Terminations=2, Packaging="Cut Tape (CT)", Resistance (Ohms)=33, Size / Dimension="0.039\" L x 0.020\" W (1.00mm x 0.50mm)", Sort Value=33, Substitution Notes="33 , ±1% , 0402 , AEC-Q200", Supplier 1=Digi-Key
R9 R10: library part ERJ-2RKF1001X, "RES 1K OHM 1/10W 1% 0402 SMD", Limiting Element Voltage=50, Manufacturer="Panasonic Electronic Components", Maximum Overload Voltage=100, Maximum Working Voltage=10.0V, Package="0402 (1005 Metric)", Package Power="0402  (0.1W)", Power (Watts)="0.1W- 1/10W", Ratings=AEC-Q200, Sort Value=1000, Sort Value Package=402_1000, Supplier Package=0402, Supplier Part Number 1=P1.00KLCT-ND, Temperature Coefficient=±100ppm/°C, Tolerance=±1%, Category=Resistors, ComponentLink1Description="Internal Datasheet", ComponentLink1URL="datasheets\Panasonic Electronic Components\AOA0000CE2.pdf", ComponentLink2Description="External Datasheet", ComponentLink2URL=http://industrial.panasonic.com/www-data/pdf/AOA0000/AOA0000CE2.pdf, Composition="Thick Film", Features=-, Height=0.40MM, Manufacturer Part Number=ERJ-2RKF1001X, Number of Terminations=2, Packaging="Cut Tape (CT)", Resistance (Ohms)=1k, Size / Dimension="0.039\" L x 0.020\" W (1.00mm x 0.50mm)", Substitution Notes="1k , ±1% , 0402 , AEC-Q200", Supplier 1=Digi-Key
R12: library part ERJ-3EKF1000V, "RES 100 OHM 1/10W 1% 0603 SMD", Limiting Element Voltage=75, Manufacturer="Panasonic Electronic Components", Maximum Overload Voltage=150, Maximum Working Voltage=3.2V, Package="0603 (1608 Metric)", Package Power="0603  (0.1W)", Power (Watts)="0.1W- 1/10W", Ratings=AEC-Q200, Sort Value Package=603_100, Supplier Package=0603, Supplier Part Number 1=P100HCT-ND, Temperature Coefficient=±100ppm/°C, Tolerance=±1%, Category=Resistors, ComponentLink1Description="Internal Datasheet", ComponentLink1URL="datasheets\Panasonic Electronic Components\AOA0000CE2.pdf", ComponentLink2Description="External Datasheet", ComponentLink2URL=http://industrial.panasonic.com/www-data/pdf/AOA0000/AOA0000CE2.pdf, Composition="Thick Film", Features=-, Height=0.55MM, Manufacturer Part Number=ERJ-3EKF1000V, Number of Terminations=2, Packaging="Cut Tape (CT)", Resistance (Ohms)=100, Size / Dimension="0.063\" L x 0.031\" W (1.60mm x 0.80mm)", Sort Value=100, Stocked=0, Substitution Notes="100 , ±1% , 0603 , AEC-Q200", Supplier 1=Digi-Key
SW1: "NIDEC COPAL ELECTRONICS - CHS-01TA - DIP SWITCH, 1POS, SPST, SLIDE, SMD", Current Rating=100mA, Manufacturer="Nidec Copal", Max Operating Temperature=85°C, Max Voltage Rating (DC)=24V, Min Operating Temperature=-40°C, Voltage Rating (DC)=6V, Actuator Type="Slide (Standard)", Body Material=Polyphenylene, Category="DIP Switches", ComponentLink1Description=https://datasheet.ciiva.com/2863/chs-2863448.pdf?src-supplier=Digi-Key, ComponentLink1URL=https://datasheet.ciiva.com/2863/chs-2863448.pdf?src-supplier=Digi-Key, ComponentLink2Description=https://datasheet.ciiva.com/2863/chs-2863449.pdf?src-supplier=Digi-Key, ComponentLink2URL=https://datasheet.ciiva.com/2863/chs-2863449.pdf?src-supplier=Digi-Key, ComponentLink3Description=https://datasheet.ciiva.com/2863/chs-2863450.pdf?src-supplier=Digi-Key, ComponentLink3URL=https://datasheet.ciiva.com/2863/chs-2863450.pdf?src-supplier=Digi-Key, Contact Material="Copper Alloy", Contact Plating=Gold, Electrical Life=2000Cycles, Lead Free="Lead Free", Length=0.098inch, Manufacturer Part Number=CHS-01TA, Mount="Surface Mount", Number of Positions=1, Orientation=Vertical, Packaging="Tape and Reel", Pitch=0.05inch, Pricing 1="1000=0.57079, 2000=0.57024, 4000=0.56944, 6000=0.46309, 8000=0.46247 (USD)", RoHS=Yes, Stock 1=19000, Supplier 1=Avnet, Supplier Part Number 1=CHS-01TA, Termination=J-Hook, Throw Configuration=SPST, Washable=Yes
U1: "Charge Controller Li-Ion/Li-Pol 15mA to 500mA 4.2V 5-Pin SOT-23 T/R", Manufacturer=Microchip, Supplier Part Number 1=MCP73832T-2ATI/OTCT-ND, ComponentLink1Description=https://datasheet.ciiva.com/1137/630369-1137827.pdf?src-supplier=Element14, ComponentLink1URL=https://datasheet.ciiva.com/1137/630369-1137827.pdf?src-supplier=Element14, ComponentLink2Description=https://datasheet.ciiva.com/15115/getdatasheetpartid-574102-15115383.pdf?src-supplier=Verical, ComponentLink2URL=https://datasheet.ciiva.com/15115/getdatasheetpartid-574102-15115383.pdf?src-supplier=Verical, ComponentLink3Description=https://datasheet.ciiva.com/1932/21984e-1932955.pdf?src-supplier=Digi-Key, ComponentLink3URL=https://datasheet.ciiva.com/1932/21984e-1932955.pdf?src-supplier=Digi-Key, ComponentLink4Description=https://datasheet.ciiva.com/1932/21984e-1932956.pdf?src-supplier=Digi-Key, ComponentLink4URL=https://datasheet.ciiva.com/1932/21984e-1932956.pdf?src-supplier=Digi-Key, ComponentLink5Description=https://datasheet.ciiva.com/1932/21984e-1932957.pdf?src-supplier=Digi-Key, ComponentLink5URL=https://datasheet.ciiva.com/1932/21984e-1932957.pdf?src-supplier=Digi-Key, ComponentLink6Description=https://datasheet.ciiva.com/17299/21984e-17299342.pdf?src-supplier=Avnet+Europe, ComponentLink6URL=https://datasheet.ciiva.com/17299/21984e-17299342.pdf?src-supplier=Avnet+Europe, Manufacturer Part Number=MCP73832T-2ATI/OT, Pricing="1=0.56, 25=0.47, 100=0.42 (USD)", RoHS=Yes, Stock=3196, Supplier 1=Digi-Key
U2: "IC REG LINEAR 3.3V 300MA SOT23-5", Case/Package=SOT-23, Dropout Voltage=200mV, Input Bias Current=25uA, Manufacturer=Microchip, Max Input Voltage=10V, Max Operating Temperature=85°C, Max Output current=300mA, Max Power Dissipation=250mW, Min Input Voltage=2V, Min Operating Temperature=-40°C, Min Output Voltage=3.3V, Output Voltage Accuracy=2%, Package Quantity=3000, Quiescent Current=50uA, Supplier Part Number 1=MCP1802T-3302I/OTCT-ND, Accuracy=2%, ComponentLink1Description=https://datasheet.ciiva.com/41458/001085944-da-01-en-ic-reg-ld-mcp1802t-3302i-ot-sot-23-5-mcp-41458834.pdf?src-supplier=Conrad, ComponentLink1URL=https://datasheet.ciiva.com/41458/001085944-da-01-en-ic-reg-ld-mcp1802t-3302i-ot-sot-23-5-mcp-41458834.pdf?src-supplier=Conrad, ComponentLink2Description=https://datasheet.ciiva.com/2040/22053c-2040531.pdf?src-supplier=Digi-Key, ComponentLink2URL=https://datasheet.ciiva.com/2040/22053c-2040531.pdf?src-supplier=Digi-Key, ComponentLink3Description=https://datasheet.ciiva.com/16454/filehandler-aspxddocname-en531342-16454309.pdf?src-supplier=Future+Electronics, ComponentLink3URL=https://datasheet.ciiva.com/16454/filehandler-aspxddocname-en531342-16454309.pdf?src-supplier=Future+Electronics, ComponentLink4Description=https://datasheet.ciiva.com/15200/getdatasheetpartid-626522-15200301.pdf?src-supplier=Verical, ComponentLink4URL=https://datasheet.ciiva.com/15200/getdatasheetpartid-626522-15200301.pdf?src-supplier=Verical, ComponentLink5Description=https://datasheet.ciiva.com/2040/22053c-2040529.pdf?src-supplier=Digi-Key, ComponentLink5URL=https://datasheet.ciiva.com/2040/22053c-2040529.pdf?src-supplier=Digi-Key, ComponentLink6Description=https://datasheet.ciiva.com/2040/22053c-2040530.pdf?src-supplier=Digi-Key, ComponentLink6URL=https://datasheet.ciiva.com/2040/22053c-2040530.pdf?src-supplier=Digi-Key, ComponentLink7Description=https://datasheet.ciiva.com/14562/70048283-14562246.pdf?src-supplier=Allied+Electronics, ComponentLink7URL=https://datasheet.ciiva.com/14562/70048283-14562246.pdf?src-supplier=Allied+Electronics, ComponentLink8Description=https://datasheet.ciiva.com/46395/808935-46395672.pdf?src-supplier=Element14, ComponentLink8URL=https://datasheet.ciiva.com/46395/808935-46395672.pdf?src-supplier=Element14, ComponentLink9Description=https://datasheet.ciiva.com/8239/jp531342-8239437.pdf?src-supplier=Avnet, ComponentLink9URL=https://datasheet.ciiva.com/8239/jp531342-8239437.pdf?src-supplier=Avnet, Height=0.051inch, Lead Free="Lead Free", Length=0.122inch, Manufacturer Part Number=MCP1802T-3302I/OT, Mount="Surface Mount", Nominal Output Voltage=3.3V, Number of Outputs=1, Number of Pins=5, Output Current=300mA, Output Type=Fixed, Output Voltage=3.3V, Packaging="Tape and Reel", Polarity=Positive, Power Dissipation=250mW, Pricing 1="1=0.53000, 25=0.44000, 100=0.40000 (USD)", Radiation Hardening=No, REACH SVHC="No SVHC", RoHS=Yes, Stock 1=3179, Supplier 1=Digi-Key, Width=0.071inch
U3: "1.54\" 240x240 IPS Display", Manufacturer="Buy Display", Manufacturer Part Number=ER-TFT1.54-1
U4: "TVS DIODE 5.5VWM SOT143B", Capacitance @ Frequency="1pF @ 1MHz", Current - Peak Pulse (10/1000µs)=-, Manufacturer="NXP Semiconductors", Operating Temperature="-40°C ~ 85°C (TA)", Package / Case="TO-253-4, TO-253AA", Power Line Protection=Yes, Supplier Device Package=SOT-143B, Supplier Part Number 1=568-4140-1-ND, Voltage - Breakdown (Min)=6V, Voltage - Reverse Standoff (Typ)="5.5V (Max)", Applications="General Purpose", Bidirectional Channels=2, Category="Circuit Protection", ComponentLink1Description=http://www.nxp.com/documents/data_sheet/PRTR5V0U2X.pdf, ComponentLink1URL=http://www.nxp.com/documents/data_sheet/PRTR5V0U2X.pdf, Manufacturer Part Number=PRTR5V0U2X,215, Mounting Type="Surface Mount", Packaging="Cut Tape (CT)", Power - Peak Pulse=-, Pricing="1=0.57, 10=0.477, 25=0.418, 100=0.3578, 250=0.31036, 500=0.26286, 1000=0.20265 (USD)", RoHS="RoHS Compliant", Stock=11734, Supplier 1=Digi-Key, Type="Steering (Rail to Rail)", Unidirectional Channels=-, Voltage - Clamping (Max) @ Ipp=-
U5: "IC MCU 100MHZ CORTEX M33 DUAL", Manufacturer="NXP Semiconductors", Supplier Part Number 1=771-LPC55S69JEV98K, Manufacturer Part Number=LPC55S69JEV98K, Pricing="1=6.94000, 10=6.27000, 25=5.98000, 100=5.19000, 250=4.96000, 500=4.52000 (USD)", RoHS=No, Stock=2365, Supplier 1=Mouser
U6: "20Hz ~ 10kHz Digital, I²S Microphone MEMS (Silicon) 1.8V Omnidirectional (-26dB ±3dB @ 94dB SPL) Solder Pads", Manufacturer="Knowles Acoustics", Operating Supply Current=600uA, Supplier Part Number 1=423-1405-1-ND, Voltage Rating=1.8V, ComponentLink1Description=http://www.knowles.com/eng/content/download/5988/105771/version/4/file/SPH0645LM4H-BRevB.PDF, ComponentLink1URL=http://www.knowles.com/eng/content/download/5988/105771/version/4/file/SPH0645LM4H-BRevB.PDF, ComponentLink2Description=https://media.digikey.com/pdf/Data%20Sheets/Knowles%20Acoustics%20PDFs/SPH0645LM4H-B.pdf, ComponentLink2URL=https://media.digikey.com/pdf/Data%20Sheets/Knowles%20Acoustics%20PDFs/SPH0645LM4H-B.pdf, Direction=Omnidirectional, Height=1.08mm, Length=3.5mm, Manufacturer Part Number=SPH0645LM4H-B, Output Type=Digital, Packaging="Tape and Reel", Pricing 1="1=2.97, 10=2.357, 25=2.1448, 50=2.0076, 100=1.8704, 250=1.70832, 500=1.58364, 1000=1.5587 (USD)", Shape=Rectangular, Stock 1=13538, Supplier 1=Digi-Key, Termination=Solder, Width=2.65mm
U7: library part ABM3-16.000MHZ-B2-T, "Crystal 16MHz ±20ppm (Tol) ±50ppm (Stability) 18pF FUND 50Ohm 2-Pin CSMD T/R", Case/Package=CSMD, ESR (Equivalent Series Resistance)=40R, Frequency Stability=50ppm, Frequency Tolerance=20ppm, Load Capacitance=18pF, Manufacturer=Abracon, Max Operating Temperature=70°C, Min Operating Temperature=-20°C, Package Quantity=1000, Series Resistance=60R, Supplier Part Number 1=535-9103-1-ND, Accuracy=20ppm, Category=Crystals, ComponentLink1Description=https://datasheet.ciiva.com/15116/getdatasheetpartid-719852-15116752.pdf?src-supplier=Verical, ComponentLink1URL=https://datasheet.ciiva.com/15116/getdatasheetpartid-719852-15116752.pdf?src-supplier=Verical, ComponentLink2Description=https://datasheet.ciiva.com/4945/abm3-47699-4945240.pdf?src-supplier=Mouser, ComponentLink2URL=https://datasheet.ciiva.com/4945/abm3-47699-4945240.pdf?src-supplier=Mouser, ComponentLink3Description=https://datasheet.ciiva.com/855/abm3-855737.pdf?src-supplier=Digi-Key, ComponentLink3URL=https://datasheet.ciiva.com/855/abm3-855737.pdf?src-supplier=Digi-Key, ComponentLink4Description=https://datasheet.ciiva.com/855/abm3-855738.pdf?src-supplier=Digi-Key, ComponentLink4URL=https://datasheet.ciiva.com/855/abm3-855738.pdf?src-supplier=Digi-Key, ComponentLink5Description=https://datasheet.ciiva.com/855/abm3-855739.pdf?src-supplier=Digi-Key, ComponentLink5URL=https://datasheet.ciiva.com/855/abm3-855739.pdf?src-supplier=Digi-Key, ComponentLink6Description=https://datasheet.ciiva.com/16209/abm3-16209965.pdf?src-supplier=Future+Electronics, ComponentLink6URL=https://datasheet.ciiva.com/16209/abm3-16209965.pdf?src-supplier=Future+Electronics, Composition=Ceramic, Depth=3.2mm, Frequency=16MHz, Height=0.051inch, Lead Free="Lead Free", Length=5mm, Manufacturer Part Number=ABM3-16.000MHZ-B2-T, Mount="Surface Mount", Number of Pins=2, Packaging="Tape and Reel", Pricing="1=0.66000, 10=0.55300, 50=0.49780, 100=0.44260, 500=0.42044 (USD)", REACH SVHC=Yes, RoHS=Yes, Stock=9690, Supplier 1=Digi-Key, Termination=SMD/SMT, Tolerance=20ppm, Width=3.2mm
U8: "IC TXRX RS422/485 20MBPS 10MSOP", Manufacturer=Intersil, Operating Temperature="-40°C ~ 85°C", Package / Case="10-TFSOP, 10-MSOP (0.118\", 3.00mm Width)", Supplier Device Package=10-MSOP, Supplier Part Number 1=ISL3176EIUZ-TCT-ND, Voltage - Supply="3 V ~ 3.6 V", Category="Integrated Circuits (ICs)", ComponentLink1Description=http://www.intersil.com/content/dam/intersil/documents/isl3/isl3170e-71e-72e-73e-74e-75e-76e-77e-78e.pdf, ComponentLink1URL=http://www.intersil.com/content/dam/intersil/documents/isl3/isl3170e-71e-72e-73e-74e-75e-76e-77e-78e.pdf, Data Rate=20Mbps, Duplex=Full, Manufacturer Part Number=ISL3176EIUZ-T, Mounting Type="Surface Mount", Number of Drivers/Receivers=1/1, Packaging="Cut Tape (CT)", Part Status=Active, Pricing 1="1=1.79, 10=1.61, 100=1.2944, 500=1.06348, 1000=0.88117 (USD)", Protocol="RS422, RS485", RoHS="RoHS Compliant", Stock 1=9164, Supplier 1=Digi-Key, Type=Transceiver

## Free pads (board coordinates)
  round 170 hole 70: 2(0,2) 2(0,1477) 2(1400,2) 2(1400,1477)

## Via types
v1: diameter 18, hole 8, Top Layer to Bottom Layer, tented both sides, 147 vias

## Nets (pads, with @x,y where several pads share a name; then routed paths per layer and width w, separated by ;. In a path a pad name is that pad's centre, name@x,y a point inside that pad or via, vN(x,y) a via of type N, cw(c..) or ccw(c..) an arc to the next point about the centre after c; other vN are vias at no path point)
+3.3v: C4.2 C5.2 C6.2 C7.2 C8.2 C9.2 J3.1 J4.4 L2.1 P9.1 R4.2 R8.2 R10.1 R11.1 U2.5 U3.3 U3.4 U5.A3 U5.A5 U5.A9 U5.A13 U5.M1 U5.M13 U5.N7 U5.N13 U6.5 U8.10 | length 1435.3
  Top Layer w5: R10.1@479,477.68 479,541.55 C4.2@481.45,544 ; C4.2@504.69,566 v1@508,569.31 ; v1(507.56,573) 507.78,572.78 508,573 v1@508,569.31 ; v1(581,813.93) 585.39,818.31 U5.N7@613.57,818.31 ; R4.2@600,162.28 562.72,162.28 554.37,170.63 U8.10@554.37,204 556.53,206.16 556.53,234.68 559.71,237.87 R11.1@600,237.87 v1(600,255) ; C7.2@604,1013.36 605.16,1014.53 620.38,1014.53 v1(627.93,1022.08) ; C7.2@604,1018.28 C7.2@613.31,1027.59 ; U5.N13@613.57,700.2 U5.M13@633.26,700.2 633.26,659.9 616.23,642.87 611.31,642.87 602,633.56 C6.2@602,628.64 601.36,629.28 C5.2@549,629.28 549,624.35 539.69,615.04 538.04,615.04 520,597 520,581.31 512,573.31 v1@508,569.31 ; 616,1011.28 616,1001.44 633.1,984.34 633.1,936.58 U5.M1@633.26,936.43 ; v1(632.2,364.07) 662.1,364.07 J4.4@663.11,363.06 694.94,363.06 695,363 v1(701,363) ; v1(644.76,1178.71) U2.5@664.4,1178.71 ; v1(811,1096) 811,1099 811.43,1099.43 L2.1@811.43,1061.65 ; U5.A13@849.8,700.2 864.8,700.2 887.31,677.69 C9.2@891.36,677.69 ; U5.A9@849.8,778.94 850.11,779.26 865.72,779.26 v1(866.03,779.57) ; U5.A5@849.8,857.69 908.32,857.69 C8.2@914,863.36 938.27,863.36 v1(938.83,863.93) ; U5.A3@849.8,897.06 869.89,897.06 v1(876.55,903.72) ; v1(883.96,655.62) 885,656.66 885,670.35 C9.2@892.35,677.69 ; C9.2@900.88,679.78 C9.2@901.43,680.33 ; J3.1@1015,934.97 1011.56,934.97 1022.57,945.99 v1(1076.93,945.99) ; R8.2@1276,773.69 1298.56,773.69 1302.48,777.61 v1(1306,777.61) 1307,777.61 1307.26,777.87 U6.5@1356.64,777.87
  PWR w20: v1(998.83,1387) 1000,1387 P9.1@1000,1477
  Bottom Layer w5: v1@624.48,365.13 627.81,368.46 v1(632.2,364.07) 634.69,366.56 v1@639.91,366.56
  Bottom Layer w12: U3.3@616.85,450.11 616.85,368.63 620.34,365.13 v1@624.48,365.13 ; v1@639.91,366.56 644.41,371.06 U3.4@644.41,450.11
+5v_USB: D3.1 J2.1 P10.1 R7.2 U4.4 | length 982.2
  Top Layer w10: R7.2@914,1022.08 914,1020.11 917.86,1016.25 931.55,1002.56 931.55,1002.39 946.94,987 1057,987 1062.07,992.07 v1(1062.07,1017.6) ; U4.4@1032.87,1020 1059.68,1020 v1(1062.07,1017.6) ; D3.1@1047.24,1367 1081,1367 1100,1386 P10.1@1100,1477 ; J2.1@1136.57,1100.82 1136.39,1101 1105,1101 1097,1093 1097,1051 1063.6,1017.6 v1(1062.07,1017.6)
  Bottom Layer w10: v1@1062,1017.68 v1(1062.07,1017.6)
  Bottom Layer w20: v1@1062,1017.68 1062,1348 1100,1386 P10.1@1100,1477
+VIN: D1.1 P11.1 | length 136.6